# Altium PCB LimeSDR-Micro_mPCIe_1v4.PcbDoc (part 1 of 11)
Units mm, origin at the board's own origin, x right, y up, seen from the top; angles counter-clockwise.
Board outline 50.8 x 29.7 mm, 8 copper layers (Top, L2, L3, L4, L5, L6, L7, Bottom), stack 0.925 mm thick; 664 components, 386 nets, 2358 pads, 843 vias.
Unrouted connection lines stored in the file: 28.
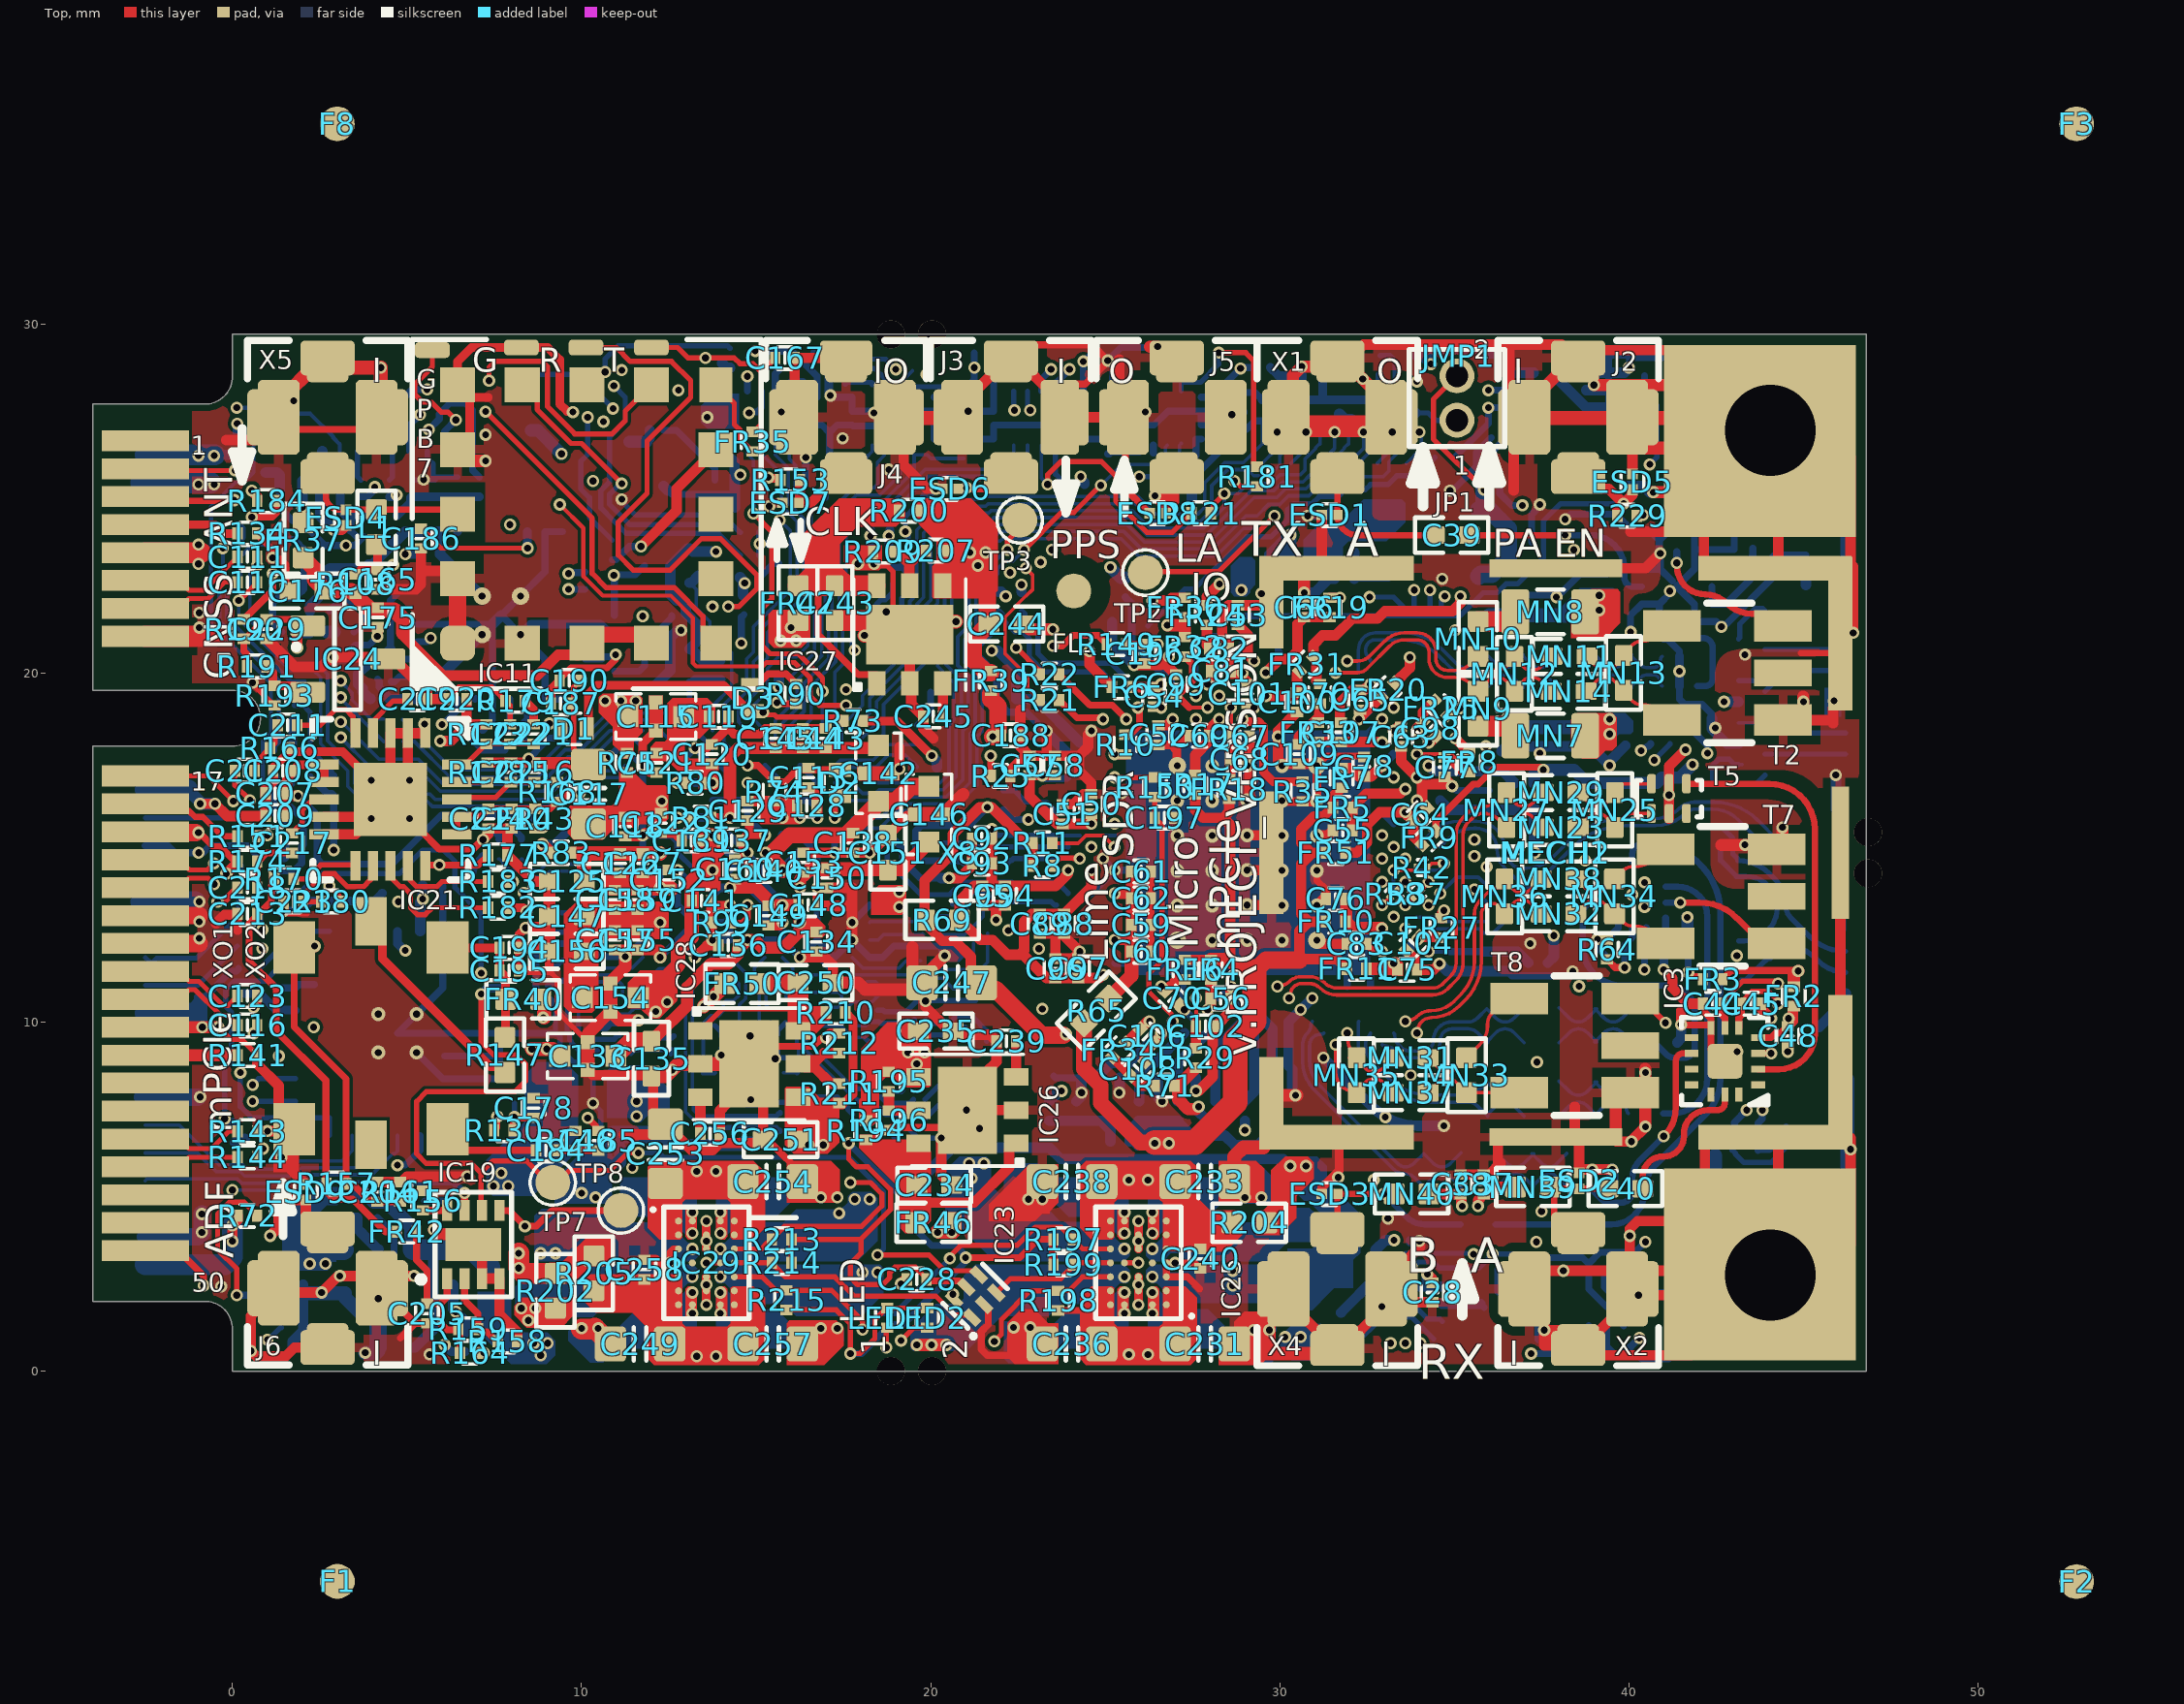
[diagram p0: Top view]
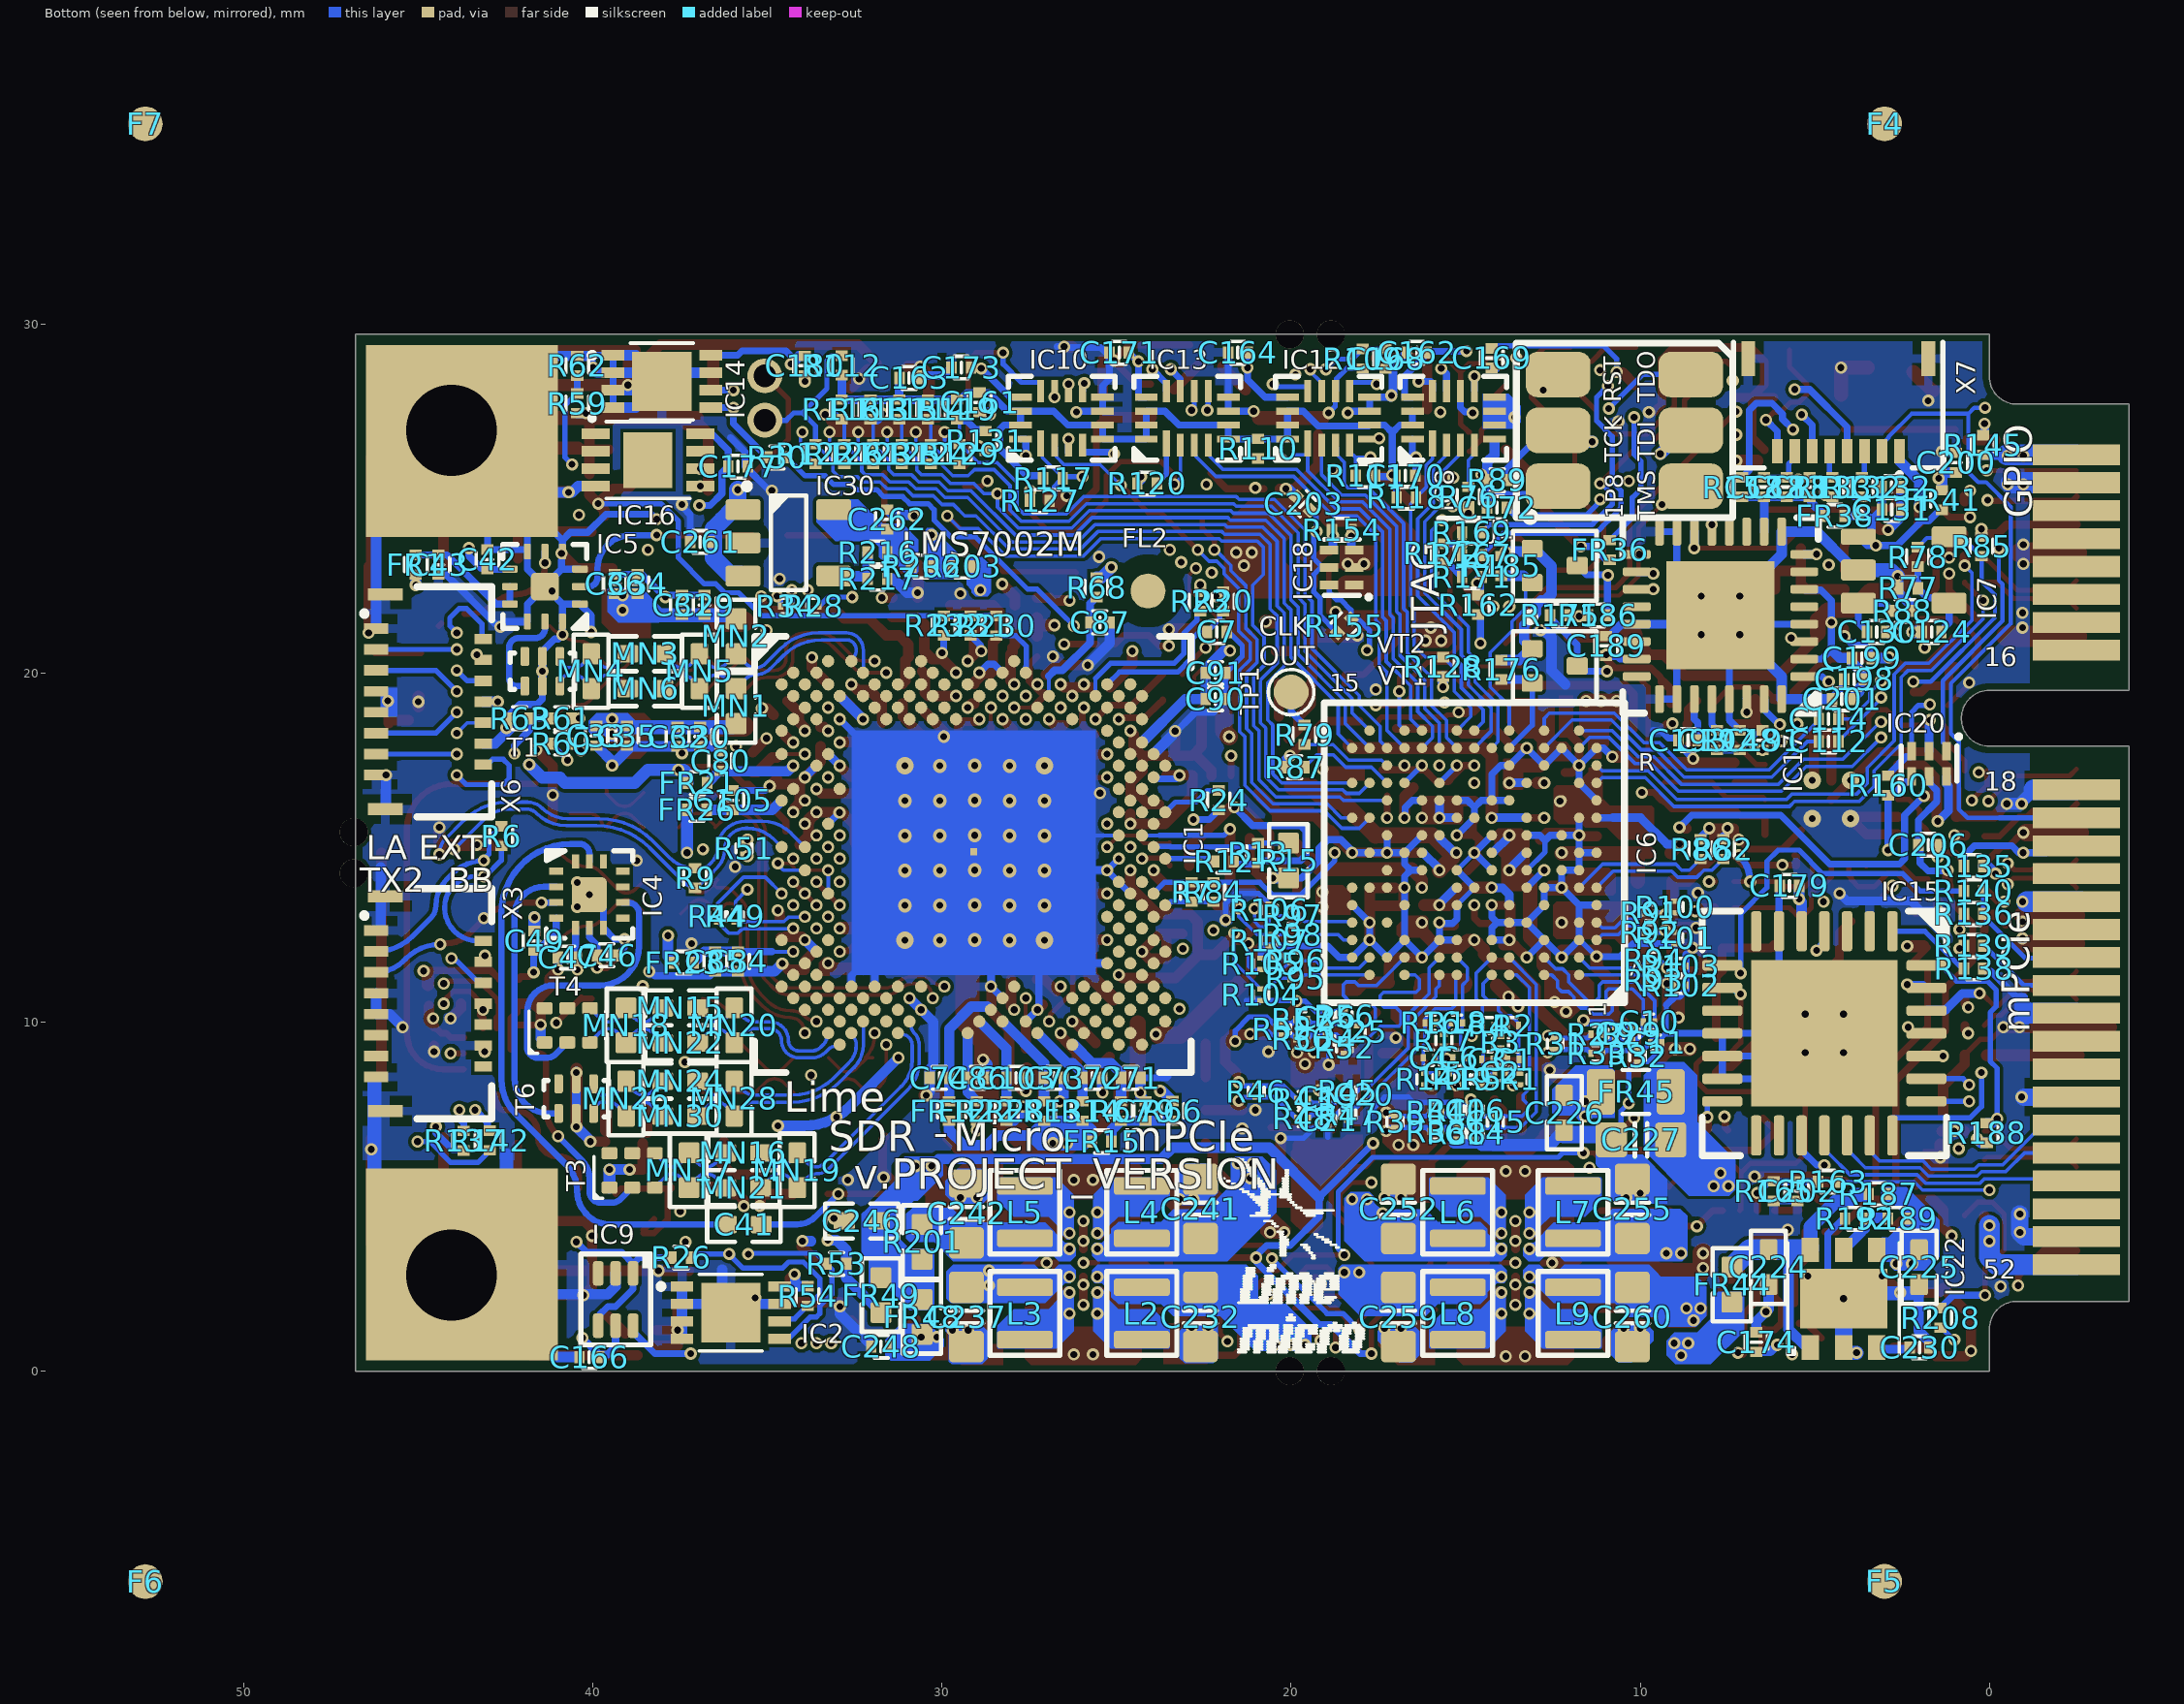
[diagram p1: Bottom view, seen from below]
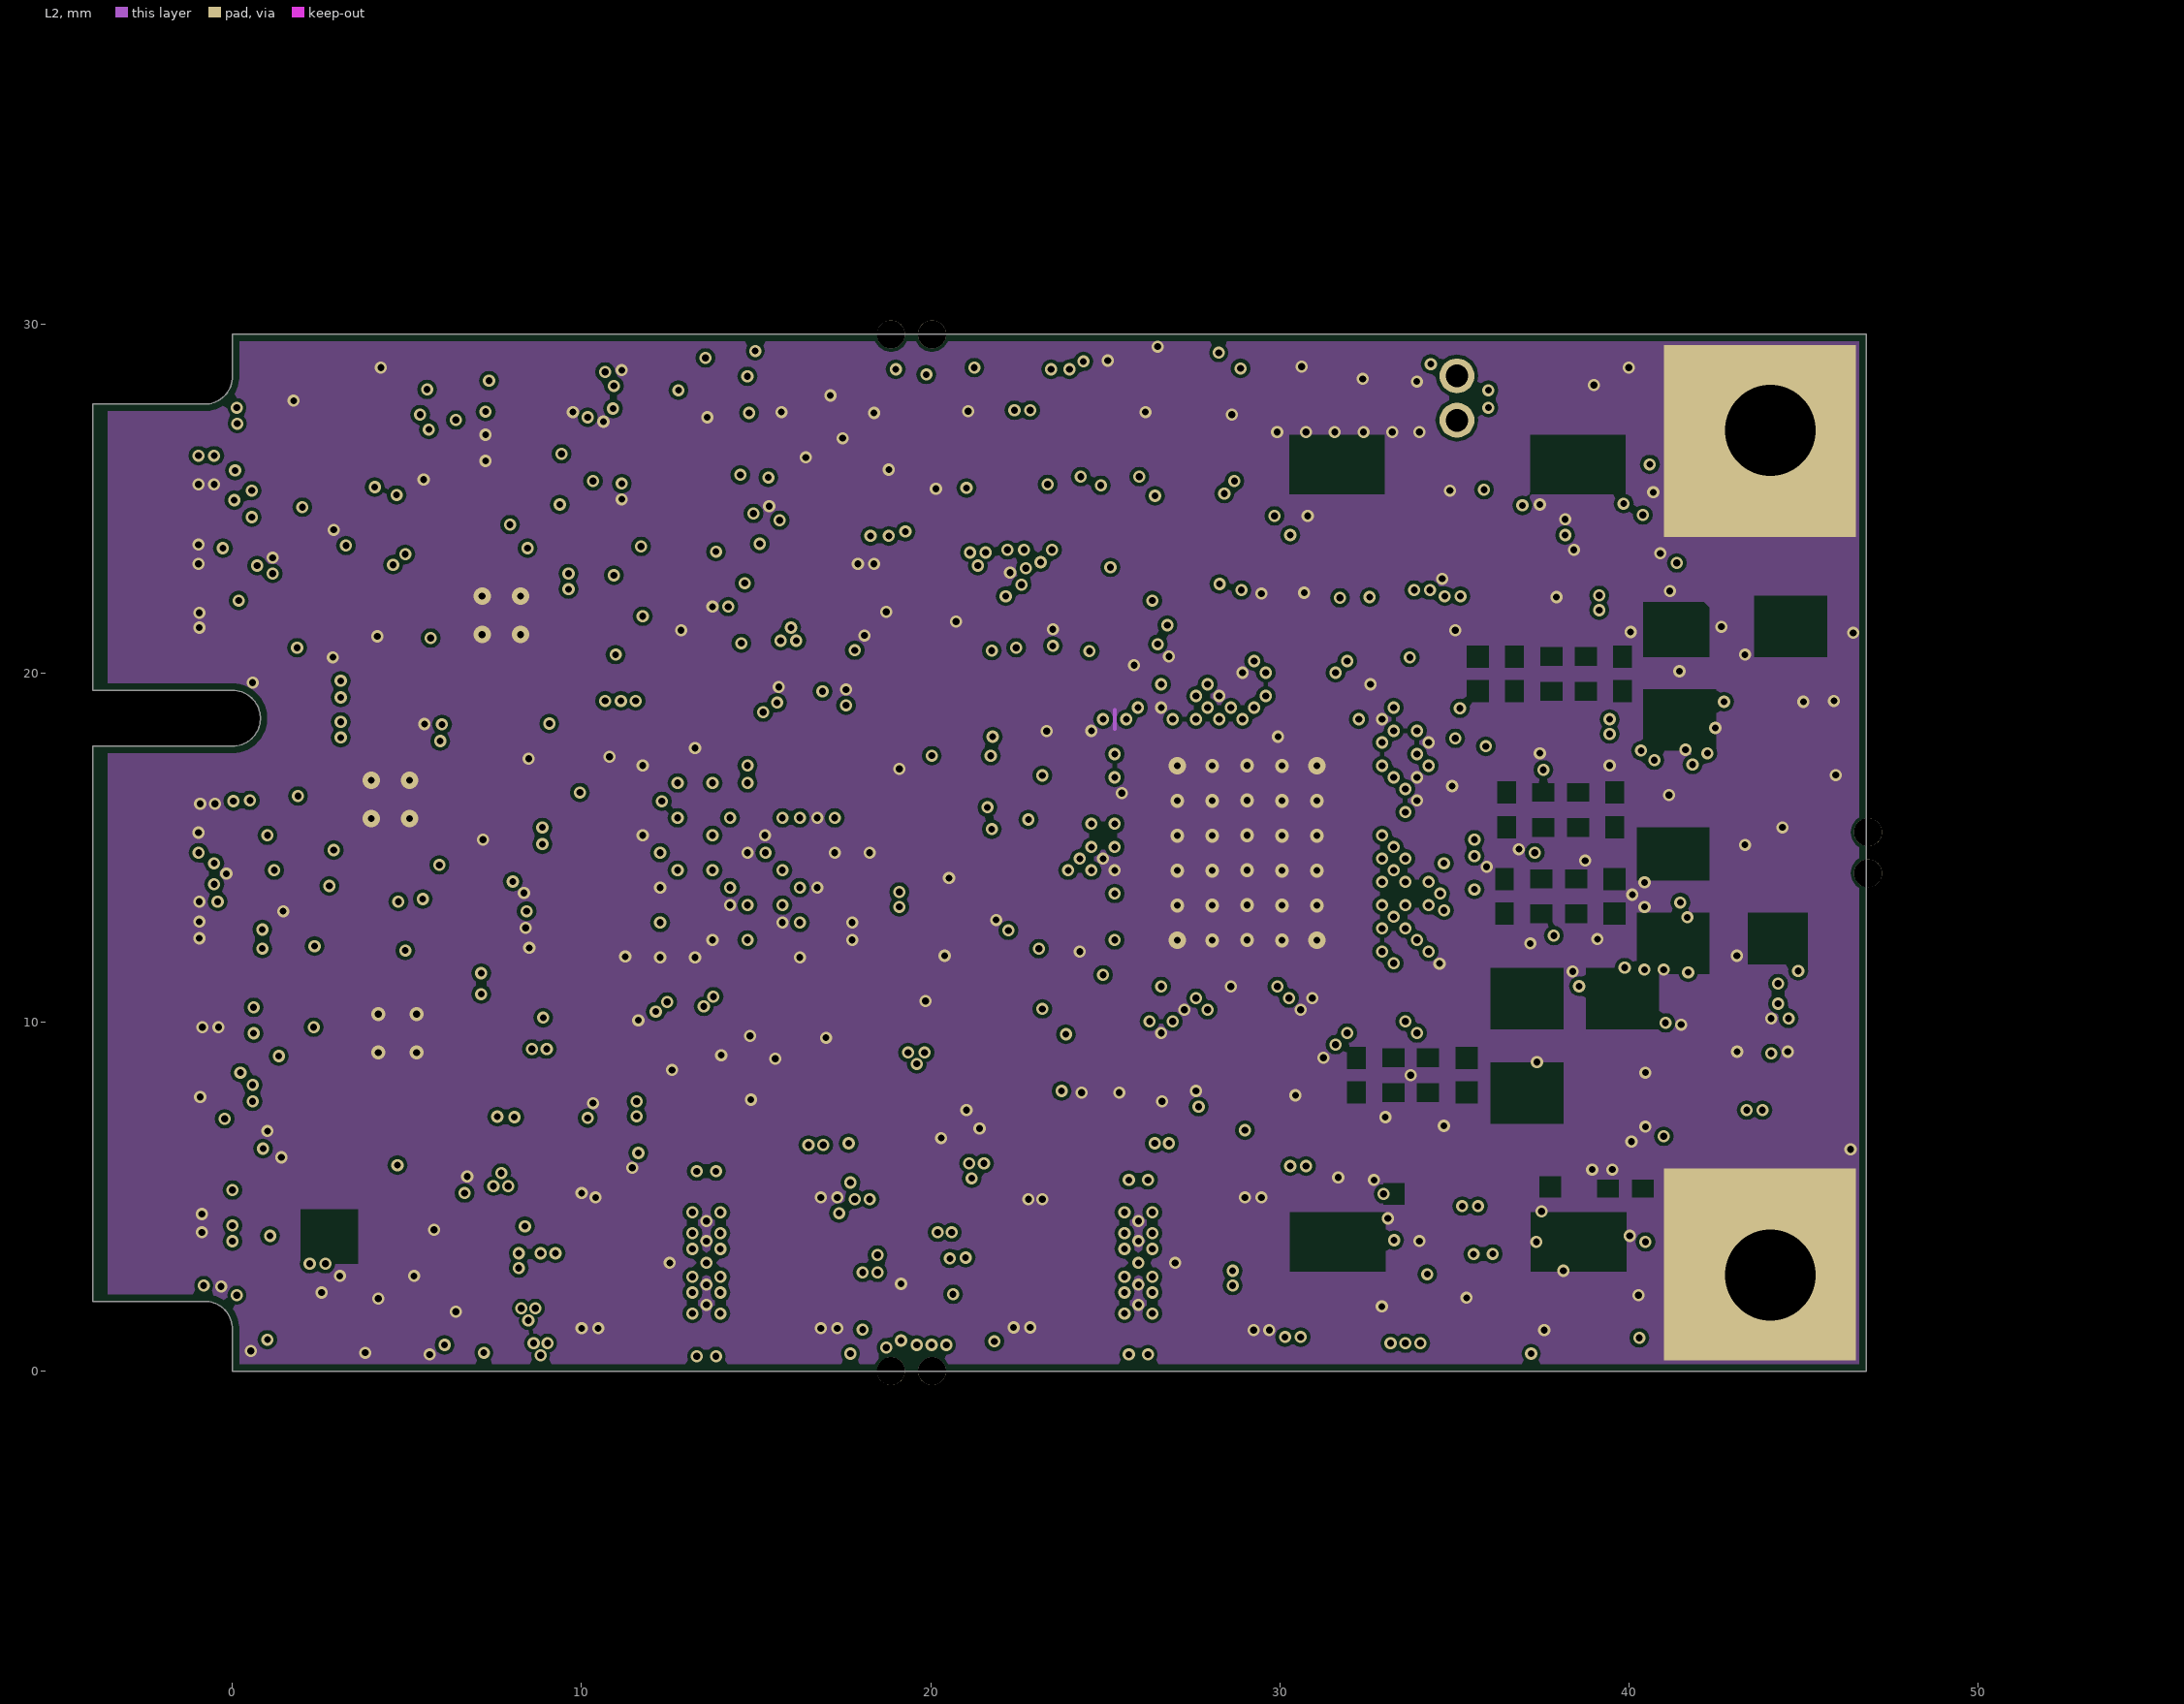
[diagram p2: L2]
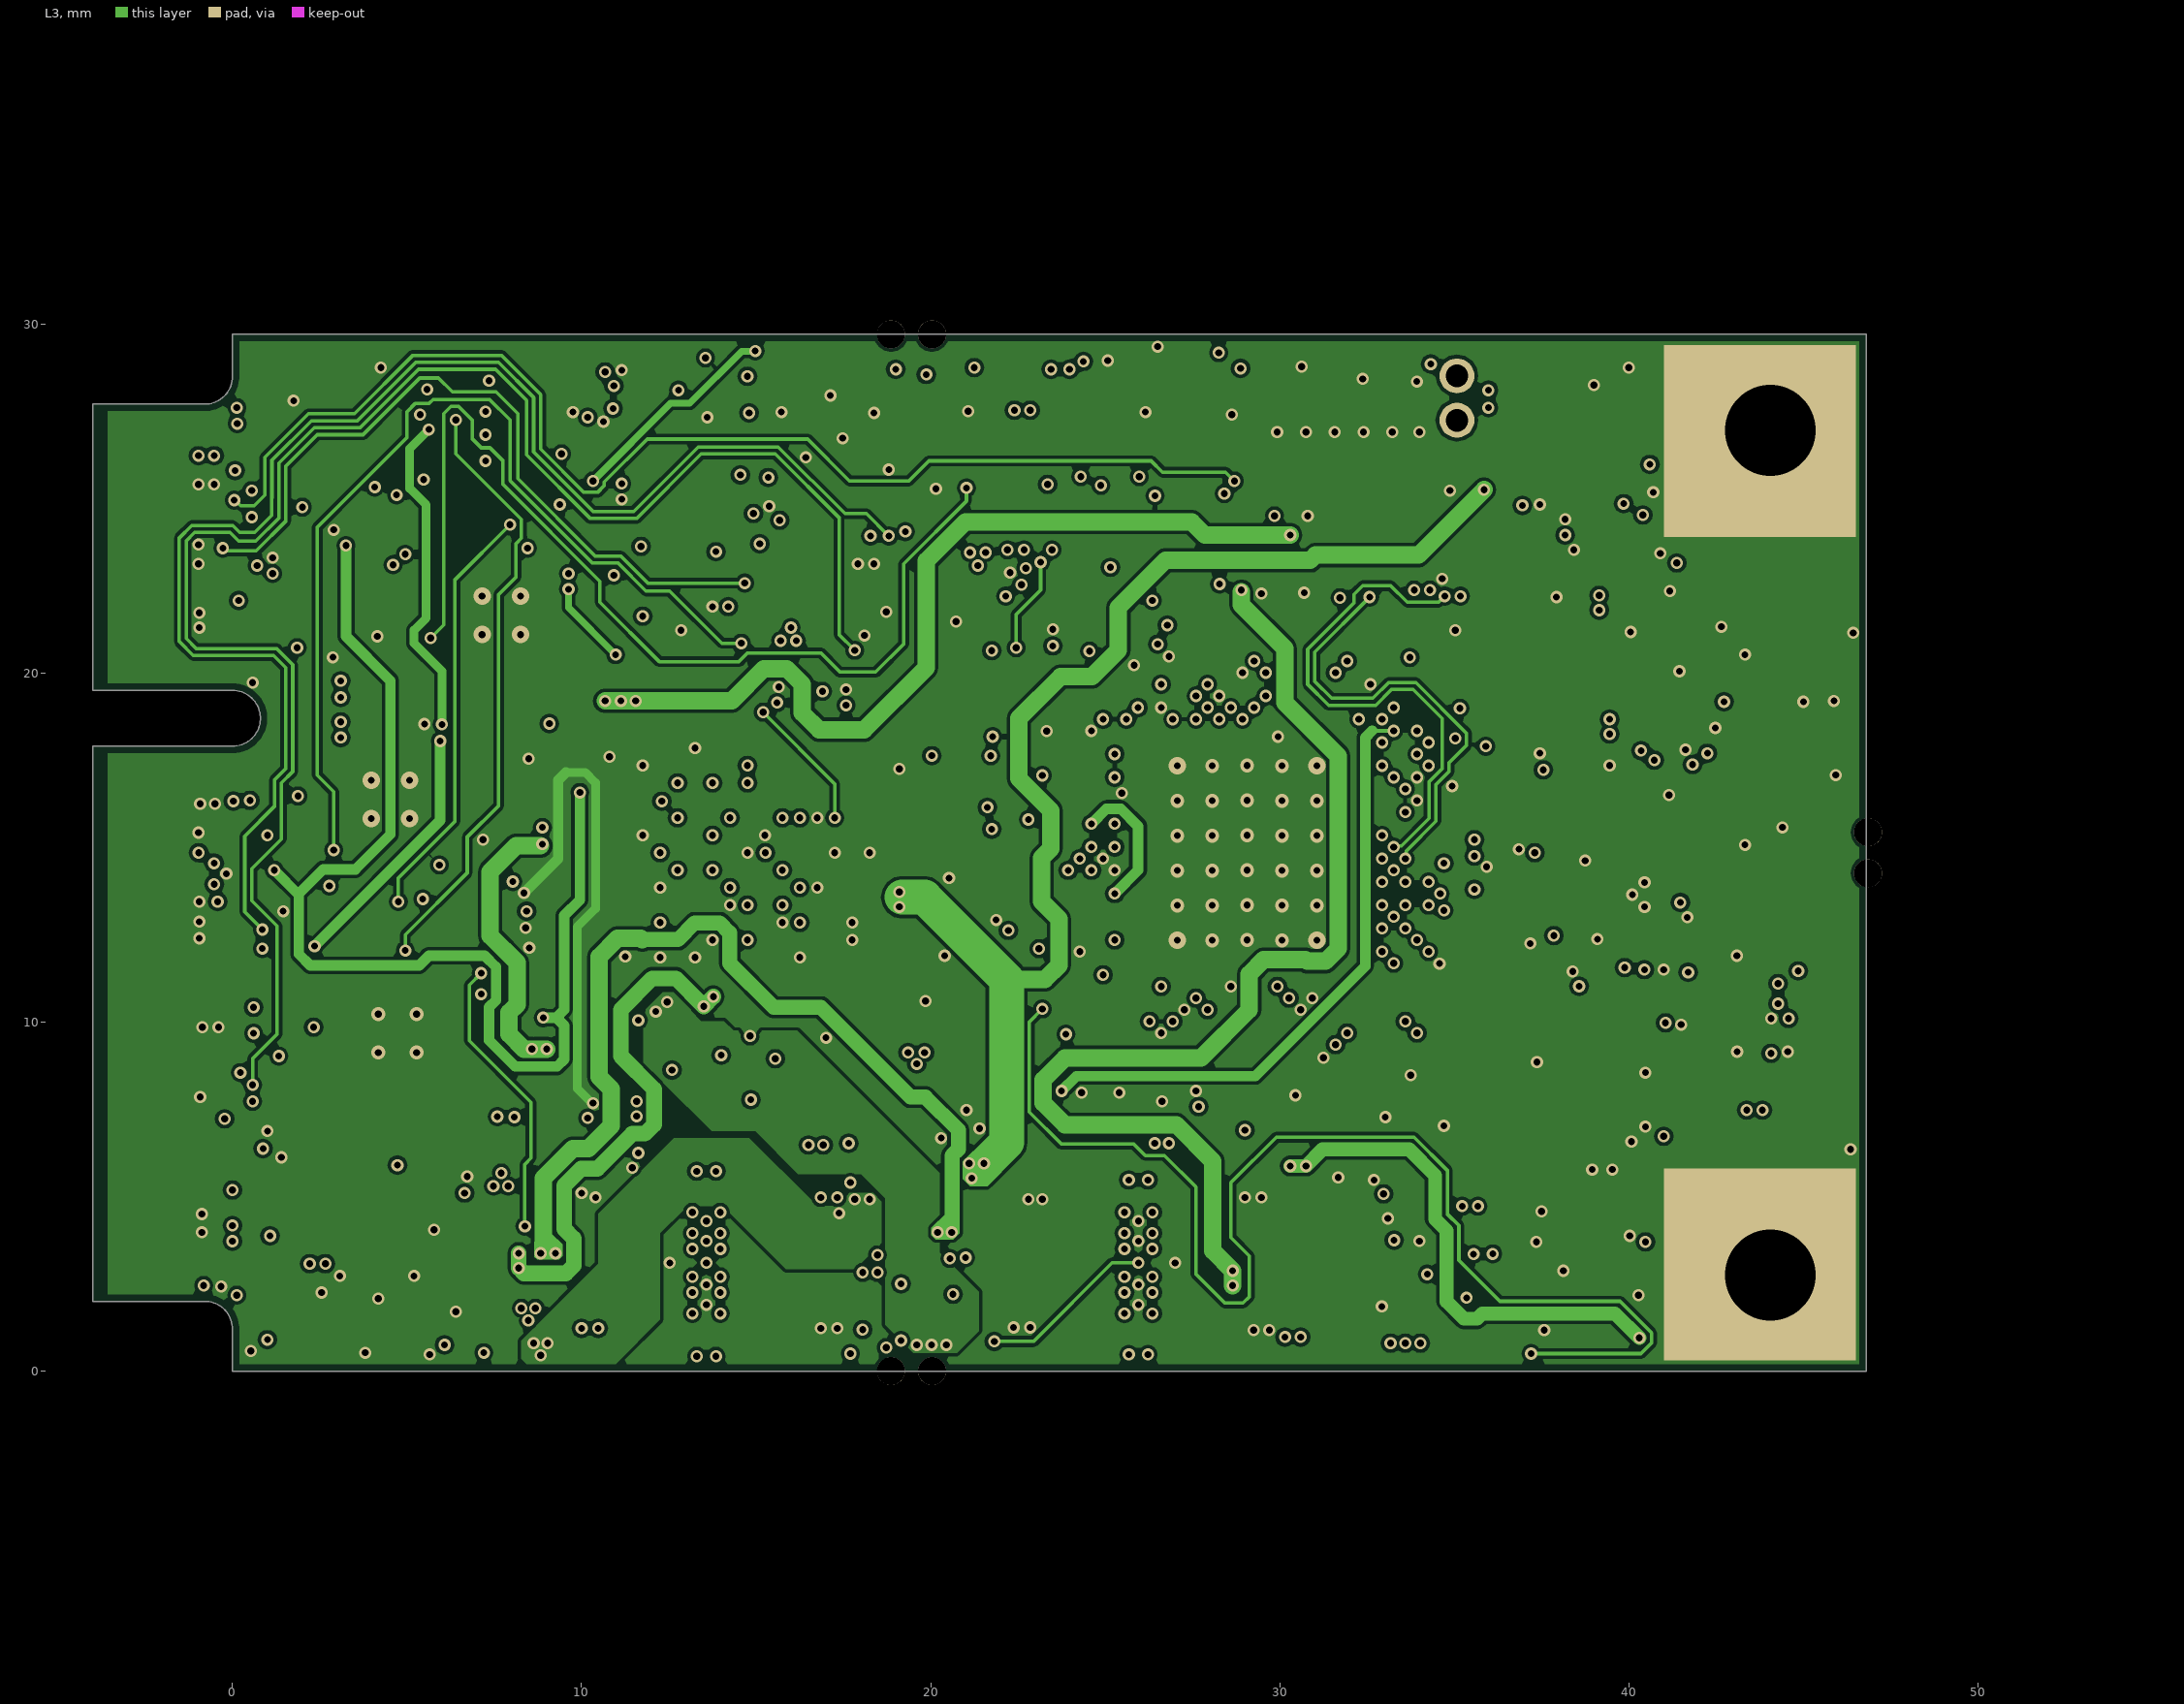
[diagram p3: L3]
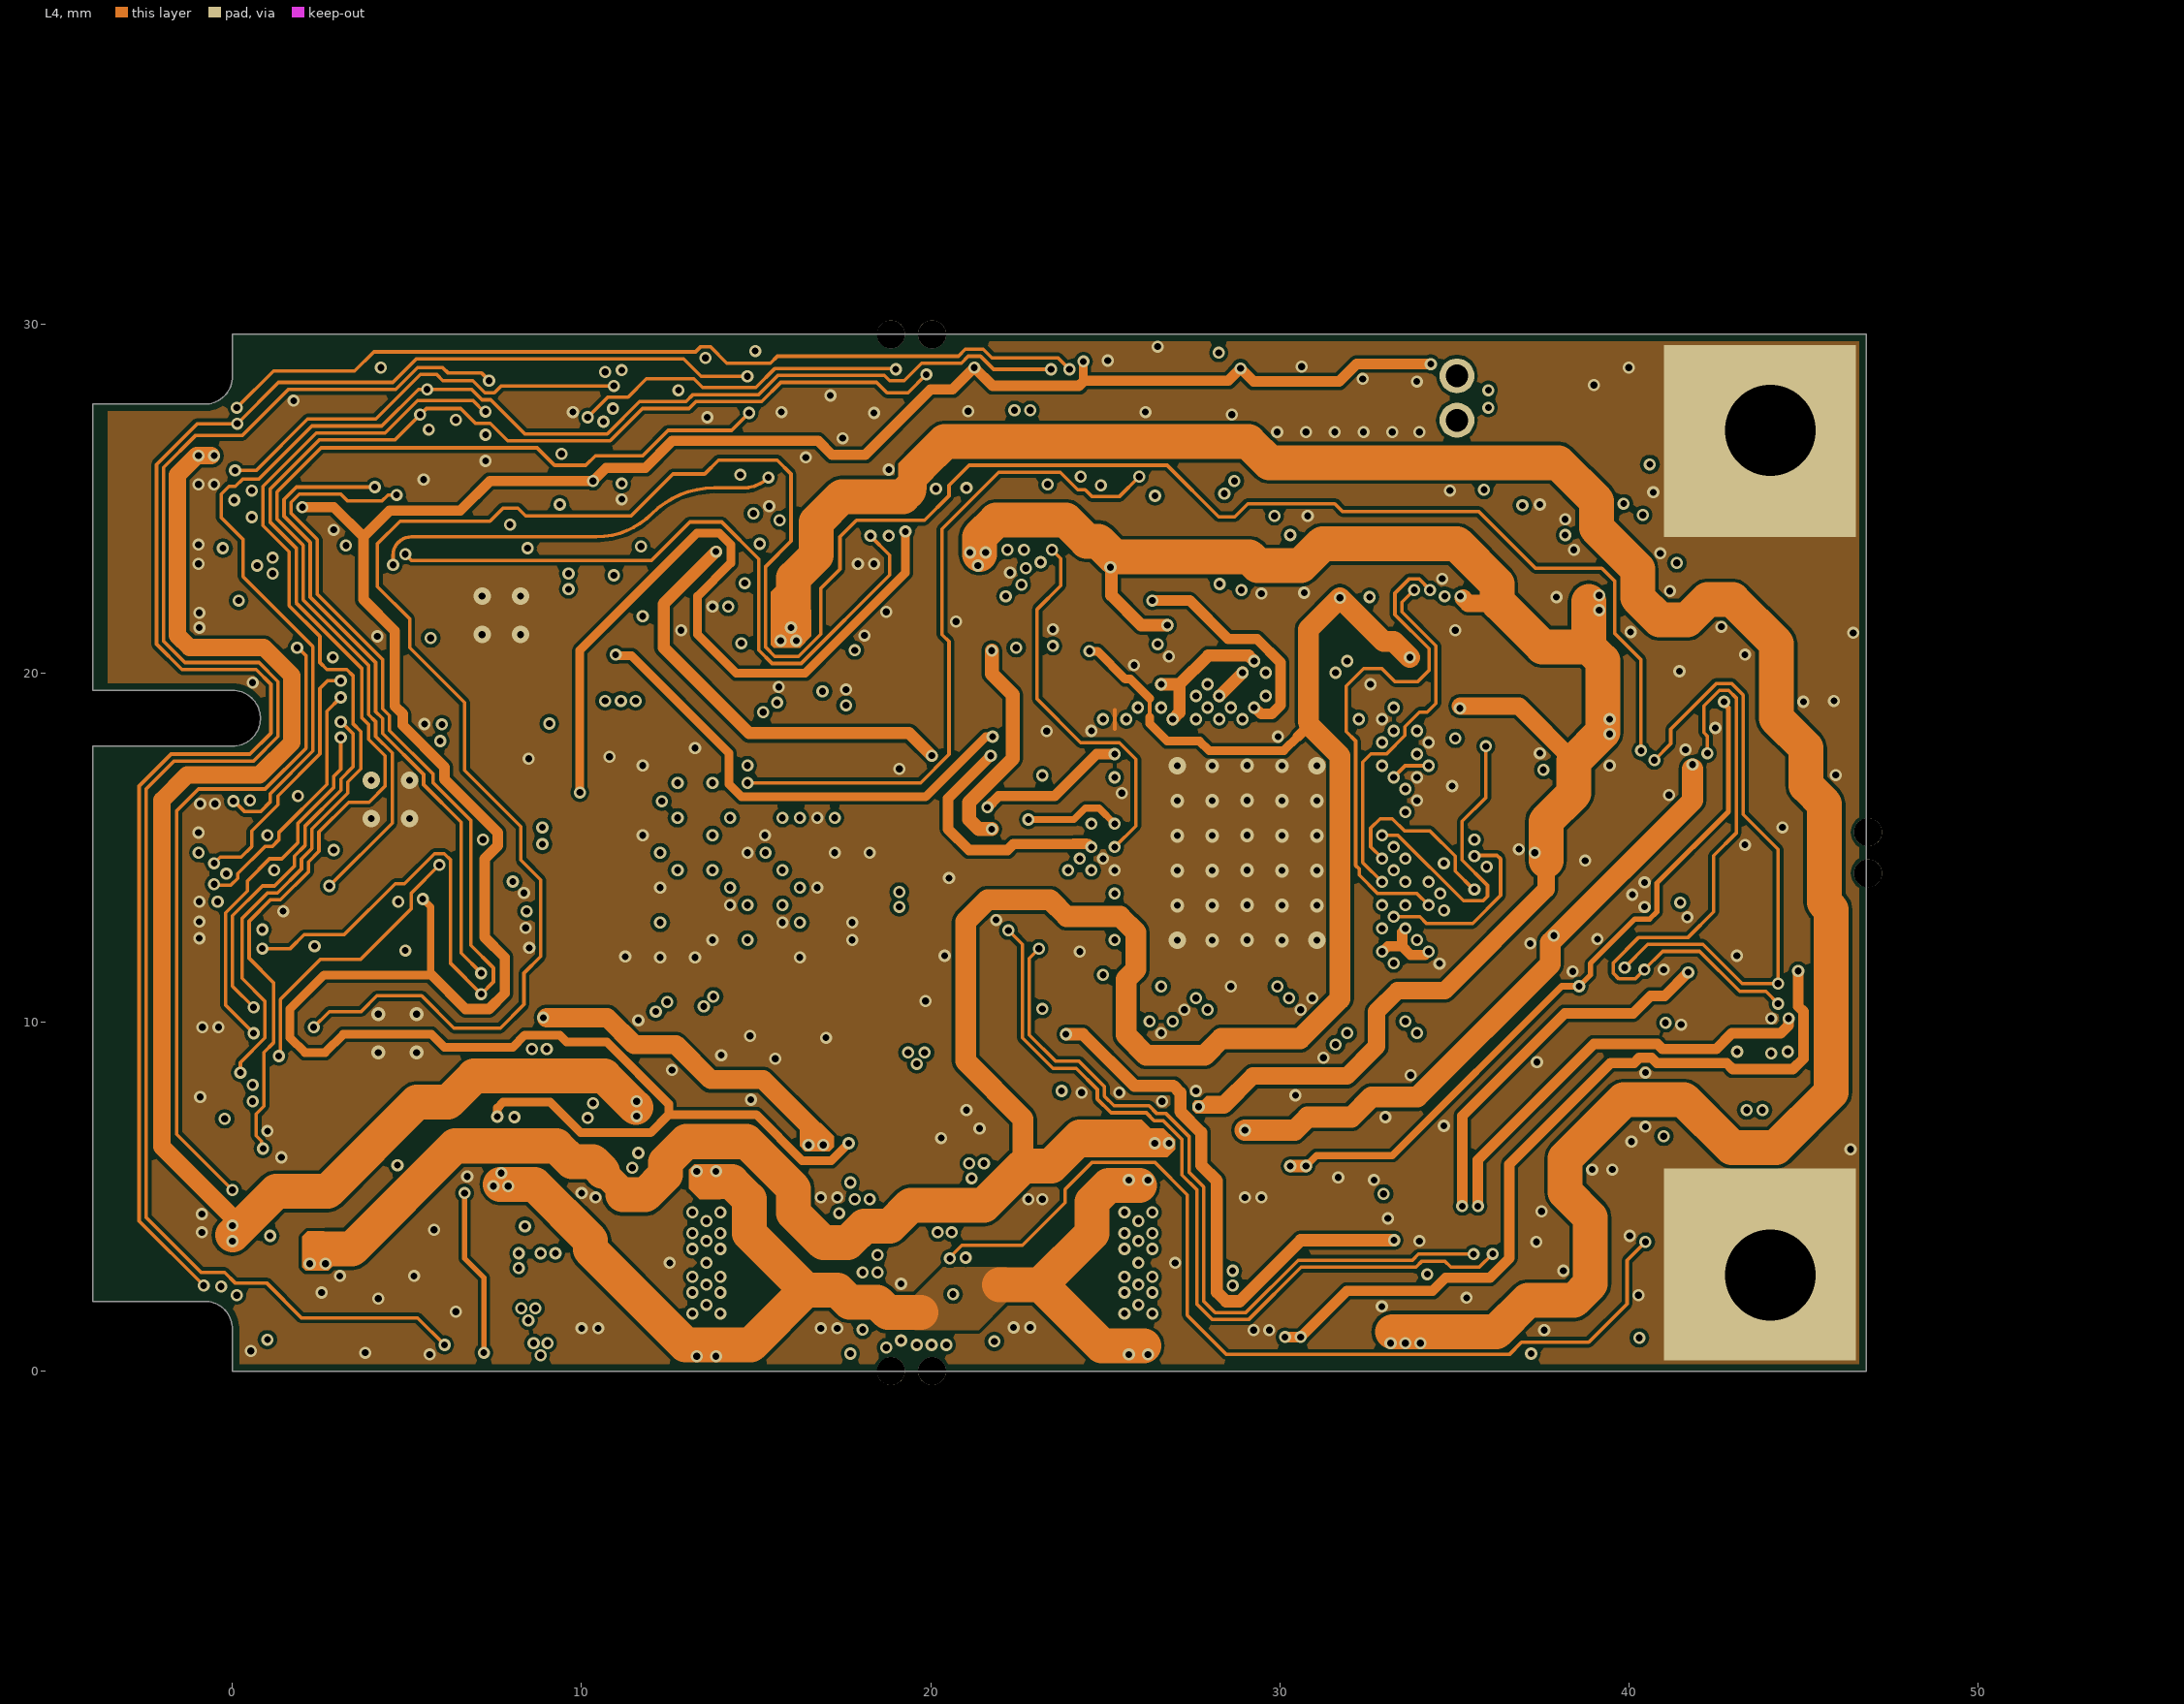
[diagram p4: L4]
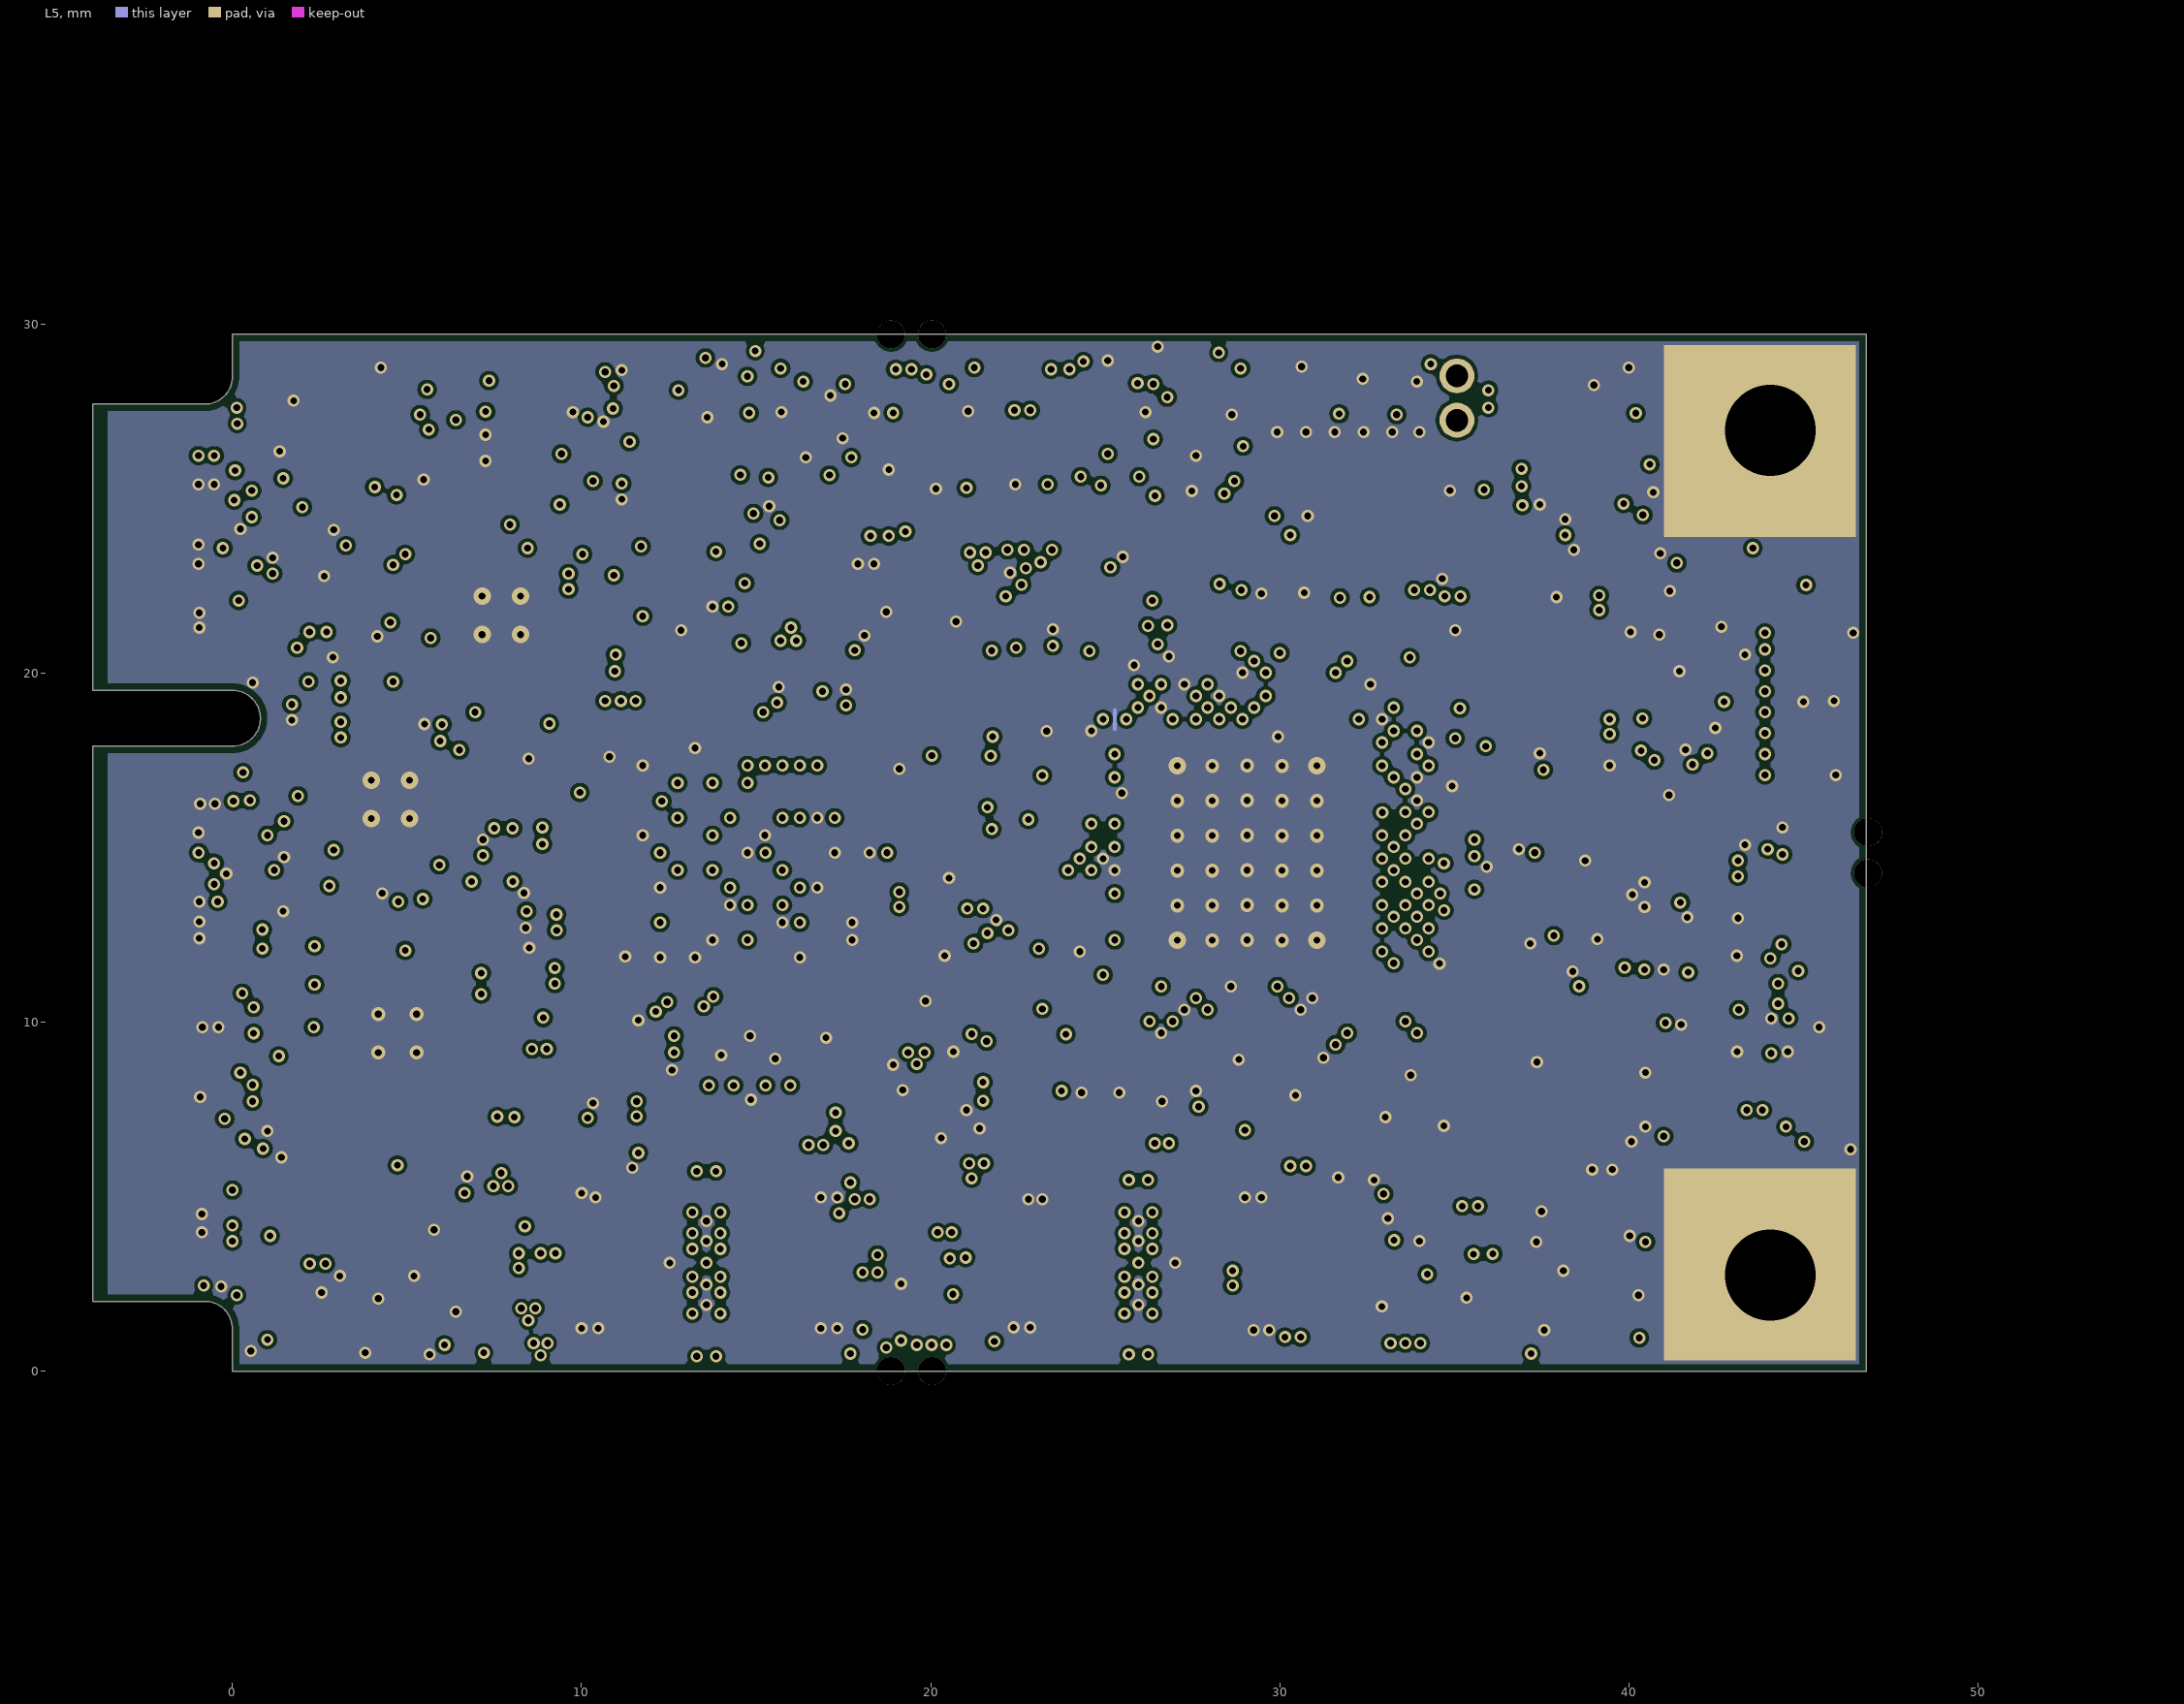
[diagram p5: L5]
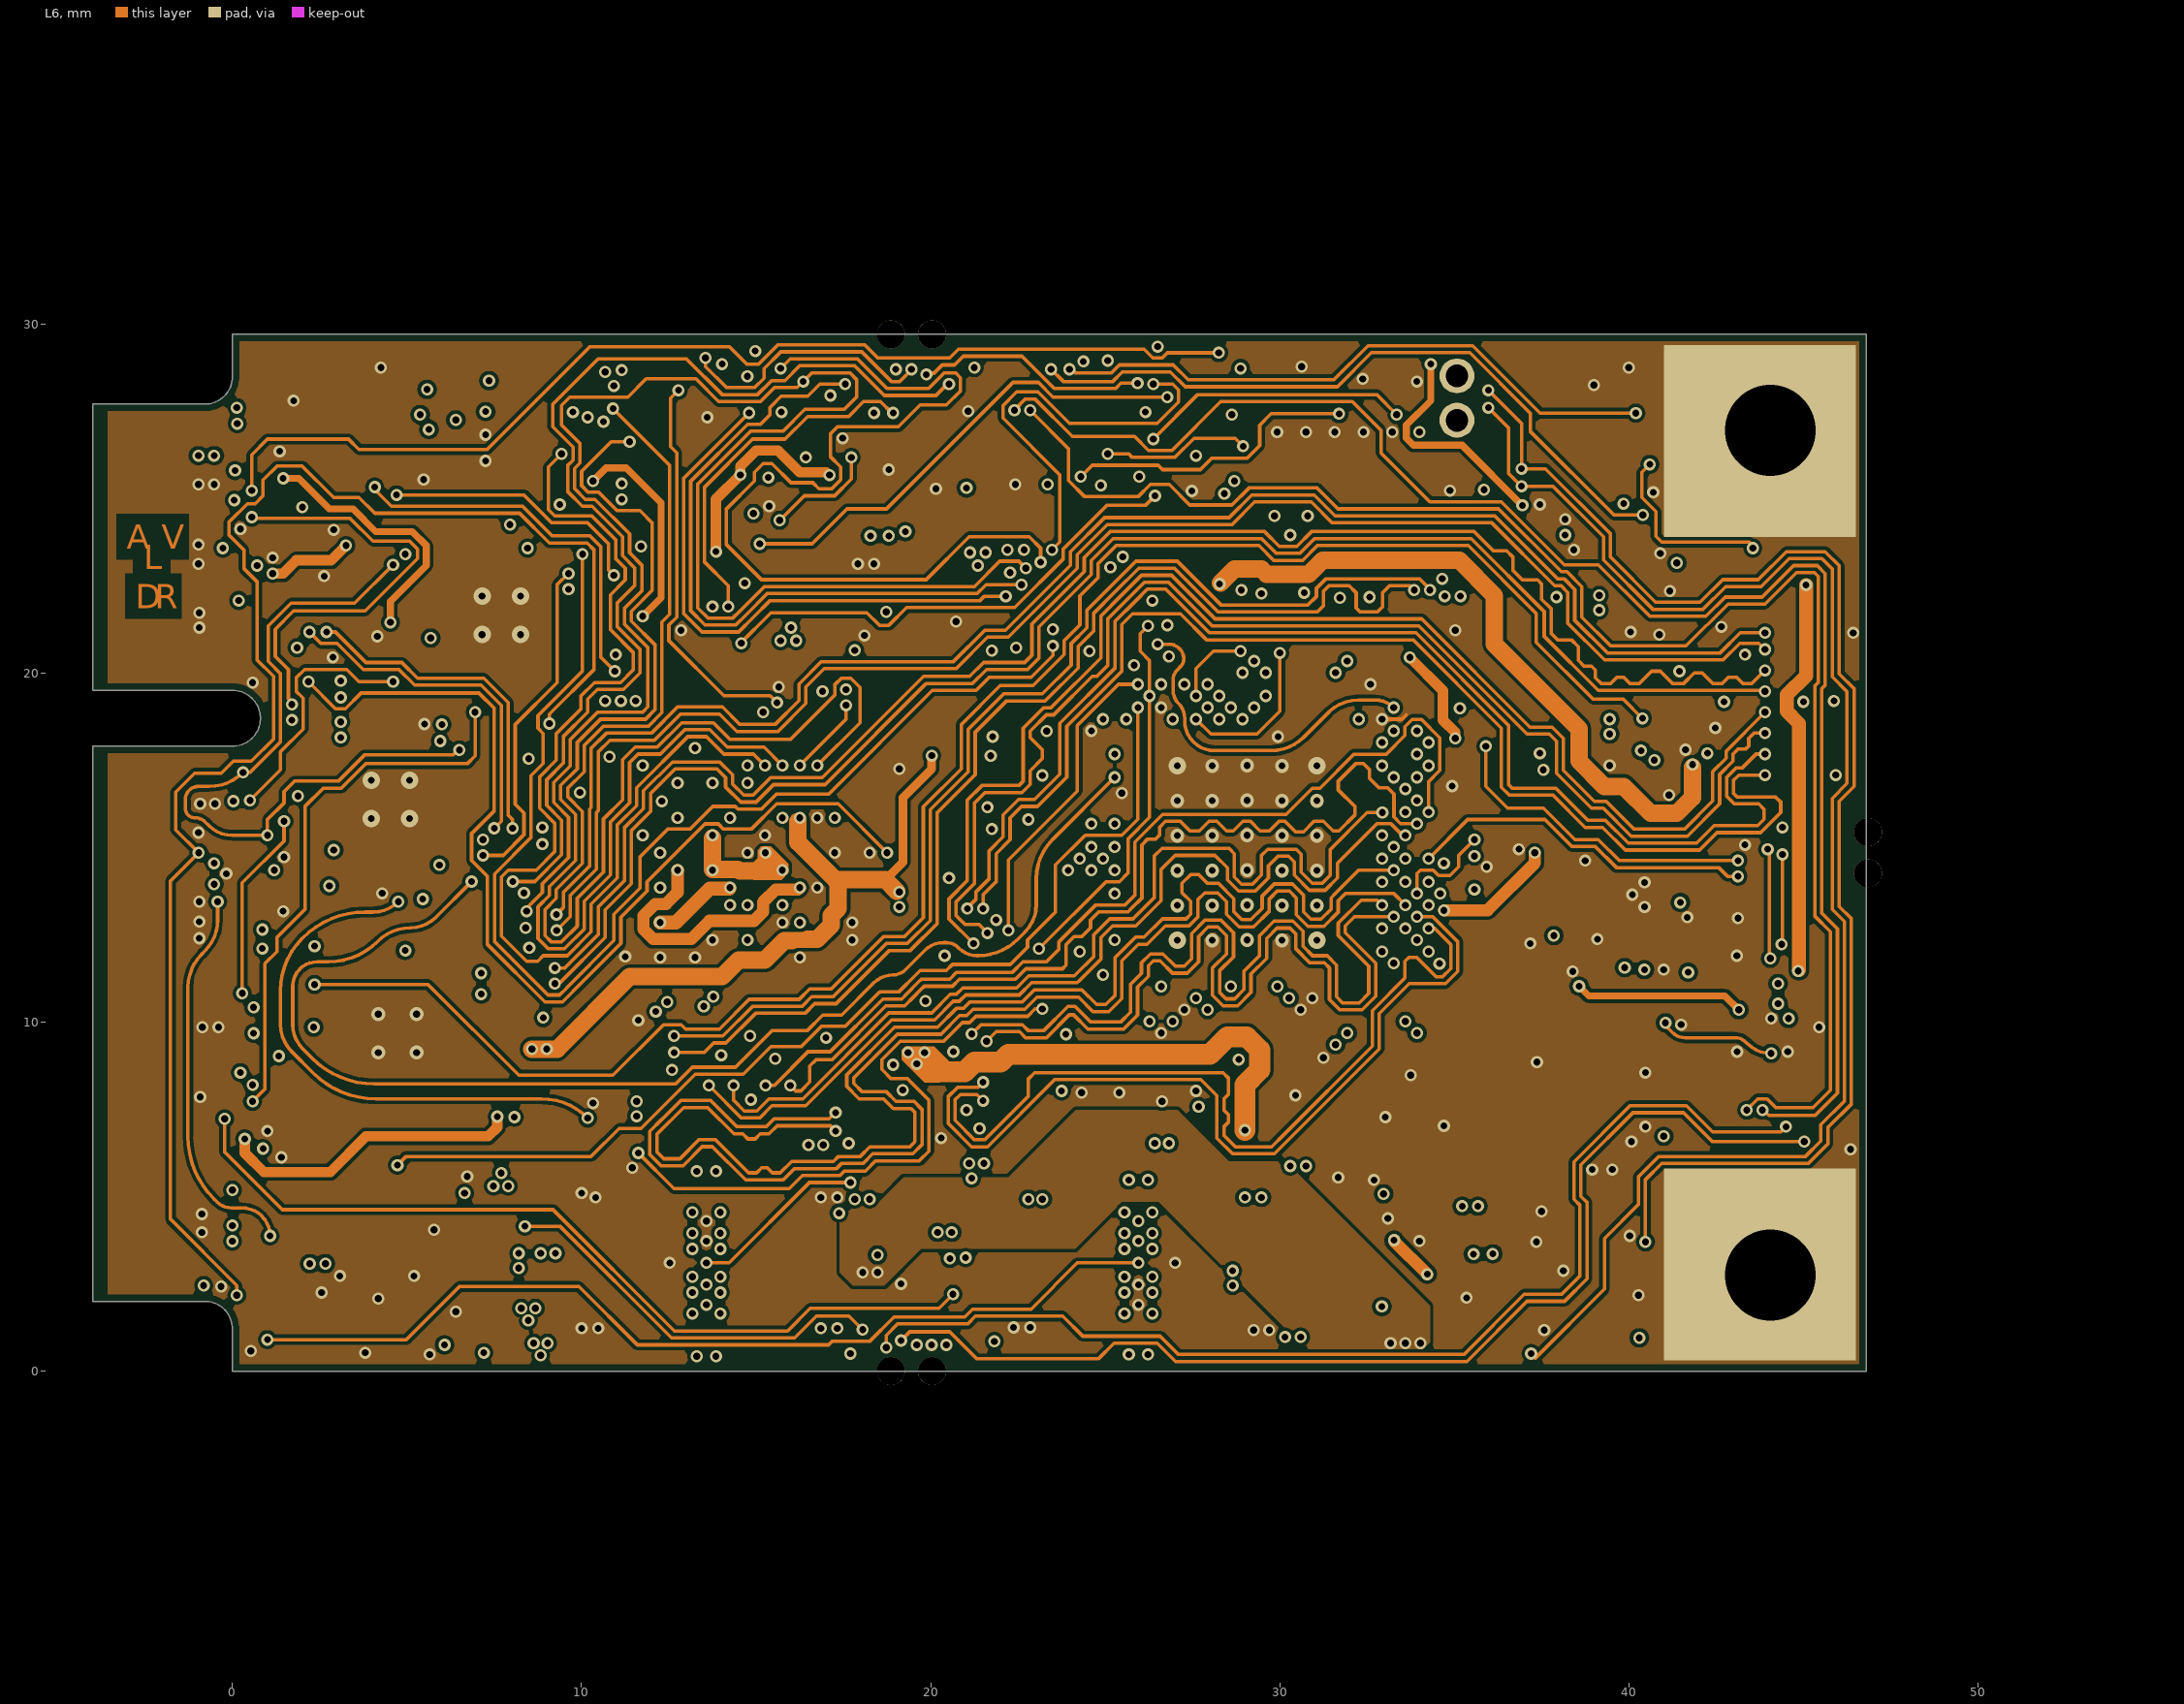
[diagram p6: L6]
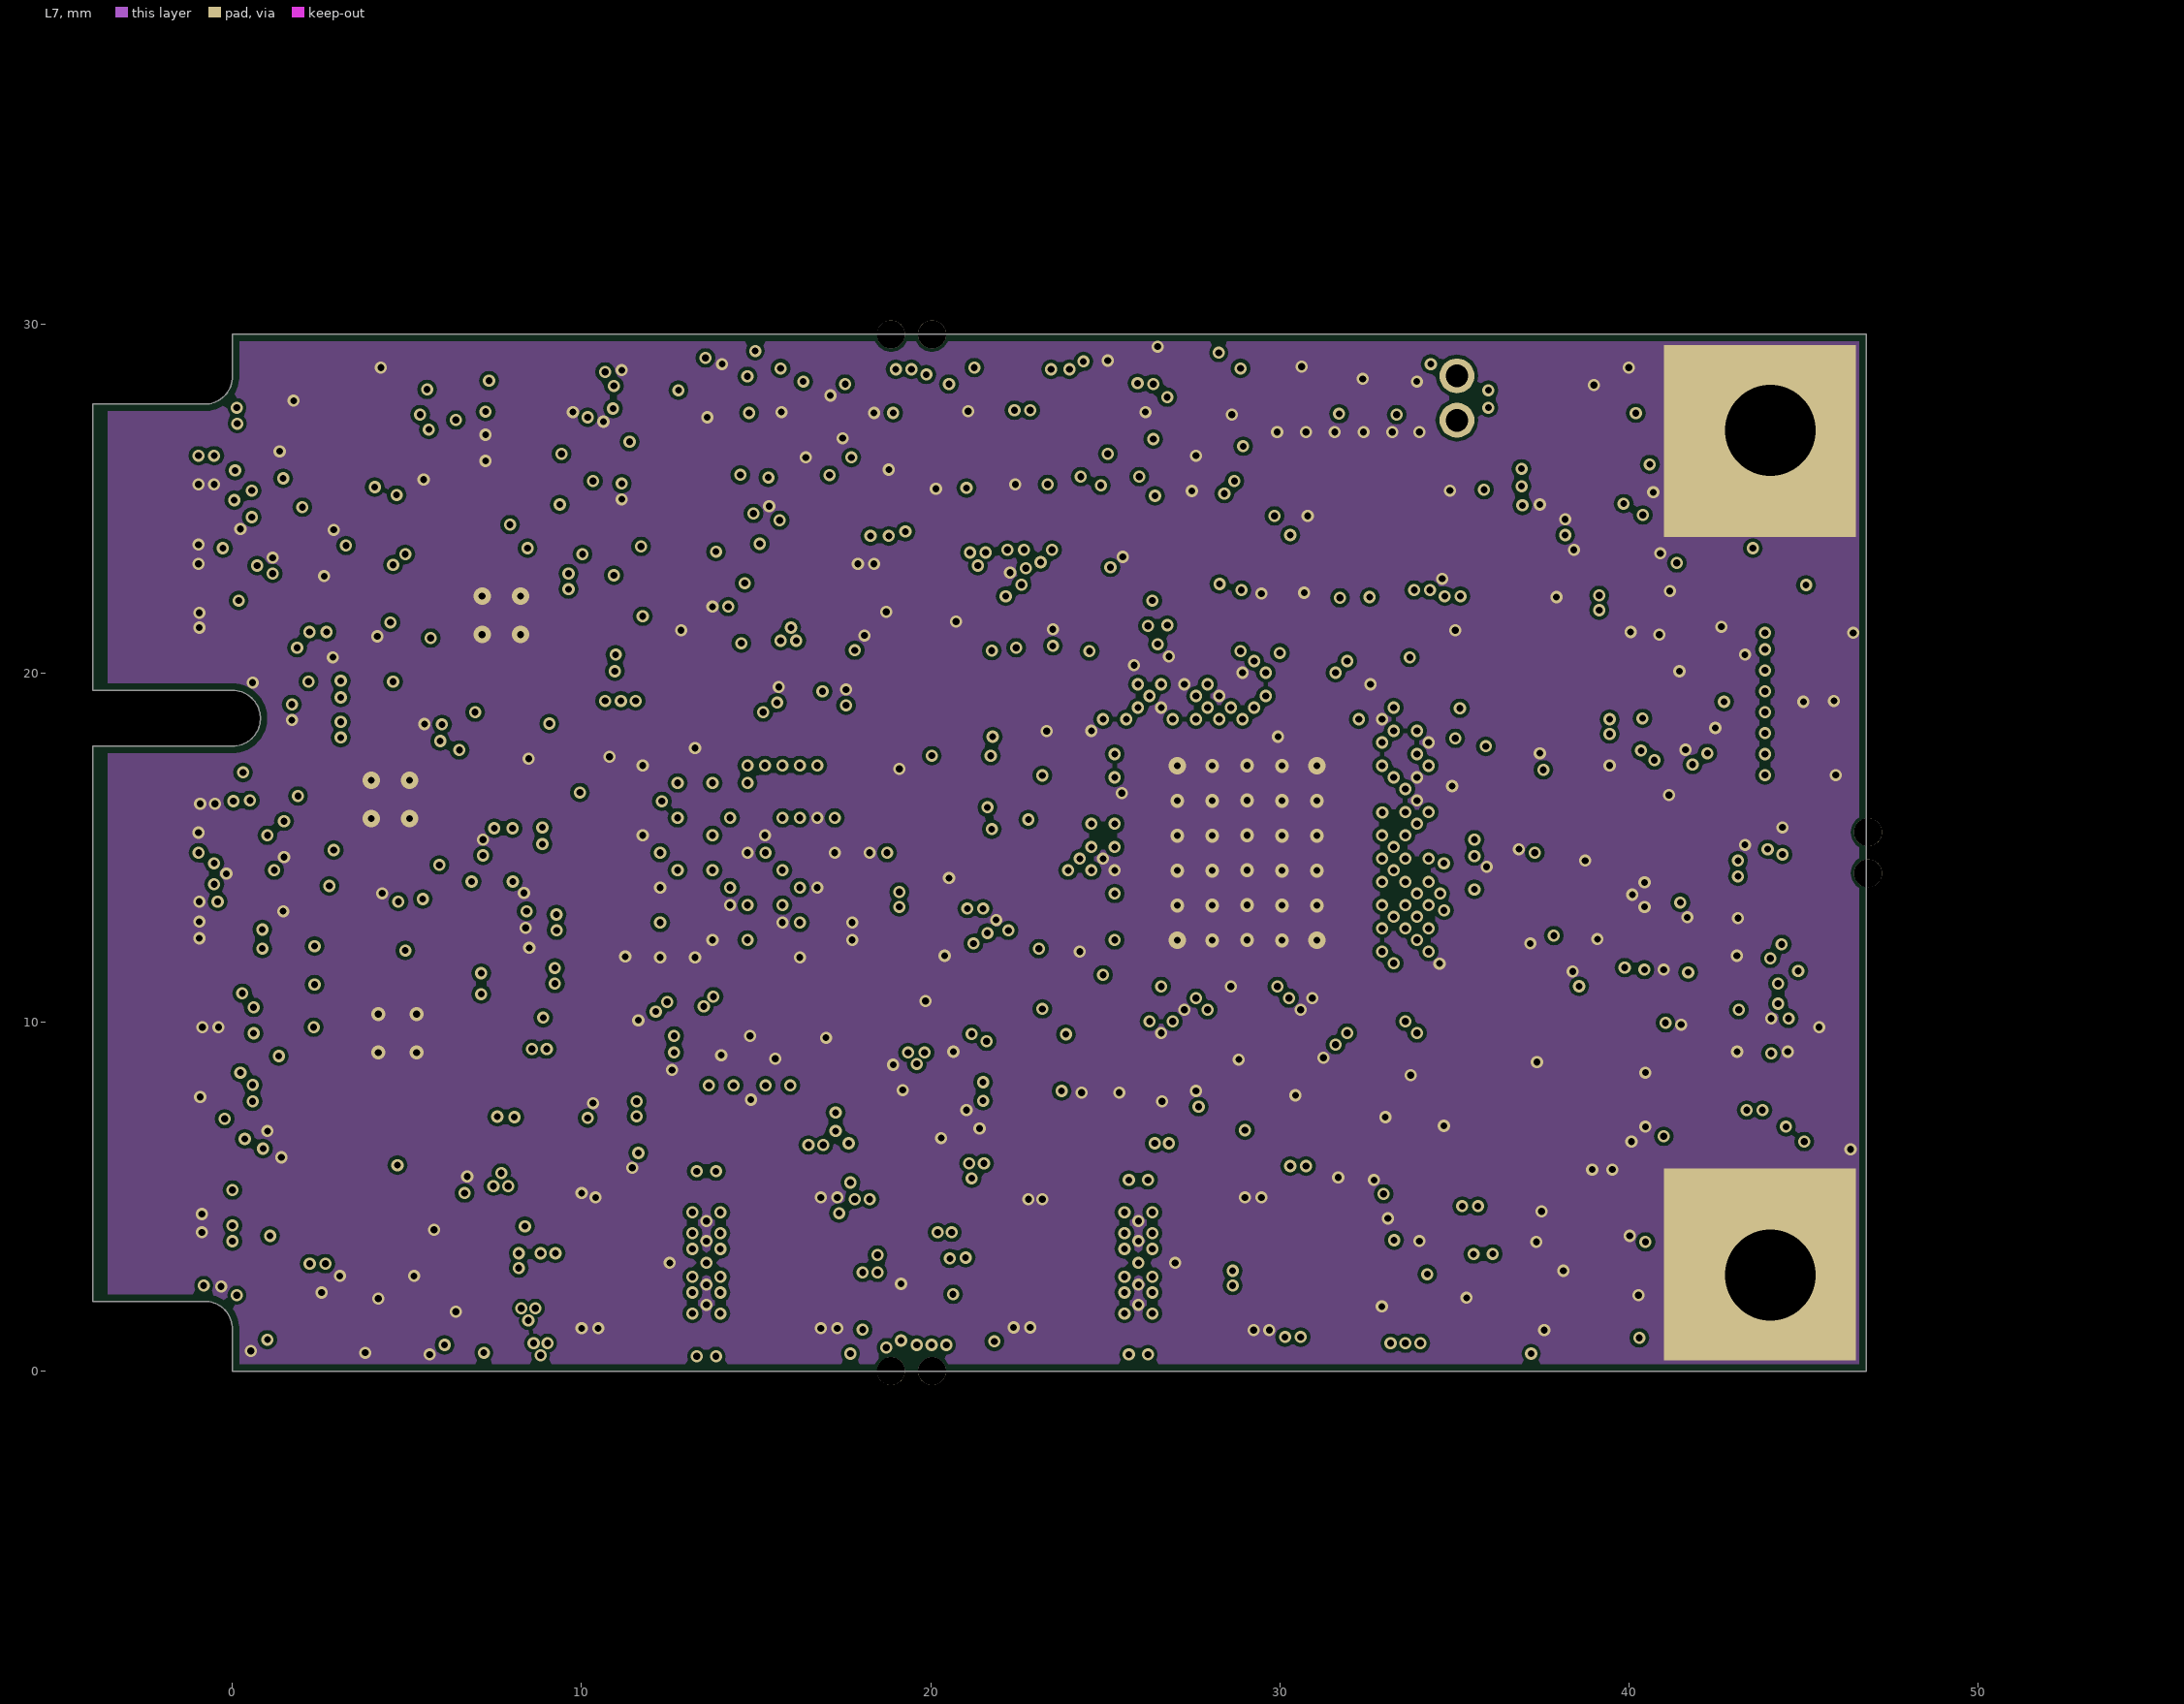
[diagram p7: L7]

## Layer stack, top to bottom
TopSolder: solder mask 0.0102, Solder Resist, Dk 3.5
Top: signal copper 0.0178
Dielectric1: core 0.1, FR-4, Dk 4.8
L2: signal copper 0.0356
Dielectric2: prepreg 0.1, FR-4, Dk 4.2
L3: signal copper 0.03
Dielectric3: core 0.1, FR-4, Dk 4.2
L4: signal copper 0.034
Dielectric 4: prepreg 0.1, Dk 4.2
L5: signal copper 0.03
Dielectric 10: core 0.1, Dk 4.2
L6: signal copper 0.03
Dielectric 11: prepreg 0.1, Dk 4.2
L7: signal copper 0.03
Dielectric 8: core 0.1, Dk 4.2
Bottom: signal copper 0.0178
BottomSolder: solder mask 0.0102, Solder Resist, Dk 3.5

## Board outline
-4,2 -4,17.9 0,17.9 ccw(c0,18.7) 0,19.5 -4,19.5 -4,27.7 -0.8,27.7 ccw(c-0.8,28.5) 0,28.5 0,29.7 46.8,29.7 46.8,0 0,0 0,1.2 ccw(c-0.8,1.2) -0.8,2

## Design rules (kind name [scope] priority, off if disabled: settings)
BoardOutlineClearance [All] p1: gap=0.2 ignorepadtopadclearanceinfootprint=FALSE
Clearance [All] p1: gap=0.1 ignorepadtopadclearanceinfootprint=FALSE
ComponentClearance ComponentClearance_MiniPCIE [HasFootprint('PCIe_MiniCard')] p1: gap=-1 collisioncheckmode=3 verticalgap=2540 showdistances=FALSE
ComponentClearance ComponentClearance_CLK_RES [InComponent('IC7') vs InComponent('R77') or InComponent('R78') or InComponent('R88')] p2: gap=-1 collisioncheckmode=3 verticalgap=2540 showdistances=FALSE
ComponentClearance ComponentClearance_RF_SHIELD [InComponent('MECH*') or InComponent('J3')] p3: gap=-10 collisioncheckmode=3 verticalgap=2540 showdistances=FALSE
ComponentClearance ComponentClearance_rakon [HasFootprint('RAKON_RPT7050A') vs HasFootprint('RAKON_TXCO')] p4: gap=-2 collisioncheckmode=3 verticalgap=2540 showdistances=FALSE
ComponentClearance ComponentClearance_BOOT_jumper [HasFootprint('MECH_JUMPER_HALF_PITCH') vs HasFootprint('HEADER_2x1_TH_HALF_PITCH')] p5: gap=-2 collisioncheckmode=3 verticalgap=2540 showdistances=FALSE
ComponentClearance [All] p6: gap=0.01 collisioncheckmode=3 verticalgap=0.254 showdistances=FALSE
DiffPairsRouting DiffPairsRouting_USB3 [InNetClass('FX3_DATA')] p1: maxlimit=0.3 minlimit=0.1 mostfreqgap=0.14 toplayer_minwidth=0.2 toplayer_maxwidth=0.2 toplayer_prefwidth=0.2 midlayer1_minwidth=0.2 midlayer1_maxwidth=0.2 midlayer1_prefwidth=0.2 midlayer2_minwidth=0.2 midlayer2_maxwidth=0.2 midlayer2_prefwidth=0.2 midlayer3_minwidth=0.2 midlayer3_maxwidth=0.2 midlayer3_prefwidth=0.2 midlayer4_minwidth=0.2 midlayer4_maxwidth=0.2 midlayer4_prefwidth=0.2 midlayer7_minwidth=0.2 midlayer7_maxwidth=0.2 midlayer7_prefwidth=0.2 midlayer9_minwidth=0.2 midlayer9_maxwidth=0.2 midlayer9_prefwidth=0.2 bottomlayer_minwidth=0.2 bottomlayer_maxwidth=0.2 bottomlayer_prefwidth=0.2 maxuncoupledlength=12.7
DiffPairsRouting DiffPairsRouting_USB3_XTAL [InNet('FX3_XTAL_N') or InNet('FX3_XTAL_P')] p2: maxlimit=0.2 minlimit=0.1 mostfreqgap=0.1 toplayer_minwidth=0.1 toplayer_maxwidth=0.4 toplayer_prefwidth=0.1 midlayer1_minwidth=0.1 midlayer1_maxwidth=0.4 midlayer1_prefwidth=0.1 midlayer2_minwidth=0.1 midlayer2_maxwidth=0.4 midlayer2_prefwidth=0.1 midlayer3_minwidth=0.1 midlayer3_maxwidth=0.4 midlayer3_prefwidth=0.1 midlayer4_minwidth=0.1 midlayer4_maxwidth=0.4 midlayer4_prefwidth=0.1 midlayer7_minwidth=0.1 midlayer7_maxwidth=0.4 midlayer7_prefwidth=0.1 midlayer9_minwidth=0.1 midlayer9_maxwidth=0.4 midlayer9_prefwidth=0.1 bottomlayer_minwidth=0.1 bottomlayer_maxwidth=0.4 bottomlayer_prefwidth=0.1 maxuncoupledlength=0.2
DiffPairsRouting DiffPairsRouting_TX_RF [InNetClass('TX_RF')] p3: maxlimit=0.14 minlimit=0.1 mostfreqgap=0.1 toplayer_minwidth=0.1 toplayer_maxwidth=0.2 toplayer_prefwidth=0.1 midlayer1_minwidth=0.1 midlayer1_maxwidth=0.2 midlayer1_prefwidth=0.1 midlayer2_minwidth=0.1 midlayer2_maxwidth=0.2 midlayer2_prefwidth=0.1 midlayer3_minwidth=0.1 midlayer3_maxwidth=0.2 midlayer3_prefwidth=0.1 midlayer4_minwidth=0.1 midlayer4_maxwidth=0.2 midlayer4_prefwidth=0.1 midlayer7_minwidth=0.1 midlayer7_maxwidth=0.2 midlayer7_prefwidth=0.1 midlayer9_minwidth=0.1 midlayer9_maxwidth=0.2 midlayer9_prefwidth=0.1 bottomlayer_minwidth=0.1 bottomlayer_maxwidth=0.2 bottomlayer_prefwidth=0.1 maxuncoupledlength=0.2
DiffPairsRouting DiffPairsRouting_RX_RF [InNetClass('RX_RF')] p4: maxlimit=0.3 minlimit=0.1 mostfreqgap=0.1 toplayer_minwidth=0.1 toplayer_maxwidth=0.3 toplayer_prefwidth=0.1 midlayer1_minwidth=0.1 midlayer1_maxwidth=0.3 midlayer1_prefwidth=0.1 midlayer2_minwidth=0.1 midlayer2_maxwidth=0.3 midlayer2_prefwidth=0.1 midlayer3_minwidth=0.1 midlayer3_maxwidth=0.3 midlayer3_prefwidth=0.1 midlayer4_minwidth=0.1 midlayer4_maxwidth=0.3 midlayer4_prefwidth=0.1 midlayer7_minwidth=0.1 midlayer7_maxwidth=0.3 midlayer7_prefwidth=0.1 midlayer9_minwidth=0.1 midlayer9_maxwidth=0.3 midlayer9_prefwidth=0.1 bottomlayer_minwidth=0.1 bottomlayer_maxwidth=0.3 bottomlayer_prefwidth=0.1 maxuncoupledlength=0.2
DiffPairsRouting [All] p5: maxlimit=0.3 minlimit=0.1 mostfreqgap=0.1 toplayer_minwidth=0.1 toplayer_maxwidth=0.5 toplayer_prefwidth=0.2 midlayer1_minwidth=0.1 midlayer1_maxwidth=0.5 midlayer1_prefwidth=0.2 midlayer2_minwidth=0.1 midlayer2_maxwidth=0.5 midlayer2_prefwidth=0.2 midlayer3_minwidth=0.1 midlayer3_maxwidth=0.5 midlayer3_prefwidth=0.2 midlayer4_minwidth=0.1 midlayer4_maxwidth=0.5 midlayer4_prefwidth=0.2 midlayer7_minwidth=0.1 midlayer7_maxwidth=0.5 midlayer7_prefwidth=0.2 midlayer9_minwidth=0.1 midlayer9_maxwidth=0.5 midlayer9_prefwidth=0.2 bottomlayer_minwidth=0.1 bottomlayer_maxwidth=0.5 bottomlayer_prefwidth=0.2 maxuncoupledlength=12.7
FabricationTestPointUsage TestPointUsage [All] p1: valid=0 allowmultiple=FALSE
FabricationTestpoint Testpoint [All] p1: side=3 testpointundercomponent=TRUE minsize=1.016 maxsize=2.54 preferedsize=1.524 minholesize=0.508 maxholesize=1.016 preferedholesize=0.813 testpointgrid=0.025 allowsidetop=TRUE allowsidebottom=TRUE usegrid=TRUE gridtolerance=0
HoleSize [All] p1: absolutevalues=TRUE maxlimit=10 minlimit=0.15 maxpercent=80.000 minpercent=20.000
HoleToHoleClearance [All] p1: gap=0.15 allowstackedmicrovias=TRUE
MatchedLengths MatchedLengths_FT_FIFO [InNetClass('FT_FIFO')] p1: tolerance=5 checknetsindiffpair=FALSE checkdiffpairvsdiffpair=TRUE checkxsignals=TRUE checkothers=TRUE
MatchedLengths MatchedLengths_LMS_PORT1 [InNetClass('LMS_PORT1')] p2: tolerance=7 checknetsindiffpair=FALSE checkdiffpairvsdiffpair=TRUE checkxsignals=TRUE checkothers=TRUE // tolerance increased due to MCLK being longer
MatchedLengths MatchedLengths_LMS_PORT2 [InNetClass('LMS_PORT2')] p3: tolerance=7.5 checknetsindiffpair=FALSE checkdiffpairvsdiffpair=TRUE checkxsignals=TRUE checkothers=TRUE // tolerance increased due to MCLK being longer
MinimumSolderMaskSliver [All] p1: minsoldermaskwidth=0.05
PlaneClearance [All] p1: clearance=0
PolygonConnect PolygonConnect_VCC3P3 [InNet('VCC3P3')] p1: connectstyle=Direct reliefconductorwidth=0.254 reliefentries=4 polygonreliefangle="90 Angle" airgapwidth=0.254
PolygonConnect PolygonConnect_GND_VIA [InNet('GND') and isvia] p2: connectstyle=Direct reliefconductorwidth=0.254 reliefentries=4 polygonreliefangle="90 Angle" airgapwidth=0.254
PolygonConnect PolygonConnect_GND_MMCX [HasFootprint('MMCX_UFL_CONN_V3_M') and IsPad and InNet('GND')] p3: connectstyle=Relief reliefconductorwidth=0.7 reliefentries=4 polygonreliefangle="90 Angle" airgapwidth=0.254
PolygonConnect PolygonConnect_GND [InNet('GND') and (OnTopLayer or OnBottomLayer)] p4: connectstyle=Relief reliefconductorwidth=0.254 reliefentries=4 polygonreliefangle="90 Angle" airgapwidth=0.254
PolygonConnect PolygonConnect_GND_inner [InNet('GND') and not (OnTopLayer or OnBottomLayer)] p5: connectstyle=Direct reliefconductorwidth=0.254 reliefentries=4 polygonreliefangle="90 Angle" airgapwidth=0.254
PolygonConnect PolygonConnect_VCC1P0_INT [InNet('VCC1P0_INT')] p6: connectstyle=Direct reliefconductorwidth=0.254 reliefentries=4 polygonreliefangle="90 Angle" airgapwidth=0.254
PolygonConnect PolygonConnect_2P05 [InNet('VCC2P05')] p7: connectstyle=Direct reliefconductorwidth=0.254 reliefentries=4 polygonreliefangle="90 Angle" airgapwidth=0.254
PolygonConnect PolygonConnect_1P35 [InNet('VCC1P35')] p8: connectstyle=Direct reliefconductorwidth=0.254 reliefentries=4 polygonreliefangle="90 Angle" airgapwidth=0.254
PolygonConnect PolygonConnect_0P9 [InNet('VCC0P9')] p9: connectstyle=Direct reliefconductorwidth=0.254 reliefentries=4 polygonreliefangle="90 Angle" airgapwidth=0.254
PolygonConnect PolygonConnect_1P5 [InNet('VCC1P5')] p10: connectstyle=Direct reliefconductorwidth=0.254 reliefentries=4 polygonreliefangle="90 Angle" airgapwidth=0.254
PolygonConnect PolygonConnect_VCC1P2_MGTAVTT [InNet('VCC1P2_MGTAVTT')] p11: connectstyle=Direct reliefconductorwidth=0.254 reliefentries=4 polygonreliefangle="90 Angle" airgapwidth=0.254
PolygonConnect PolygonConnect_VCC1P8 [InNet('VCC1P8')] p12: connectstyle=Direct reliefconductorwidth=0.254 reliefentries=4 polygonreliefangle="90 Angle" airgapwidth=0.254
PolygonConnect PolygonConnect_VCC1P8_LMS [InNet('VCC1P8_LMS')] p13: connectstyle=Direct reliefconductorwidth=0.254 reliefentries=4 polygonreliefangle="90 Angle" airgapwidth=0.254
PolygonConnect PolygonConnect_VDIO_LMS [InNet('VDIO_LMS')] p14: connectstyle=Direct reliefconductorwidth=0.254 reliefentries=4 polygonreliefangle="90 Angle" airgapwidth=0.254
PolygonConnect PolygonConnect_VDIO_LMS_FPGA [InNet('VDIO_LMS_FPGA')] p15: connectstyle=Direct reliefconductorwidth=0.254 reliefentries=4 polygonreliefangle="90 Angle" airgapwidth=0.254
PolygonConnect [All] p16: connectstyle=Relief reliefconductorwidth=0.254 reliefentries=4 polygonreliefangle="90 Angle" airgapwidth=0.254
RoutingVias [All] p1: holewidth=0.2 width=0.4 viastyle="Through Hole" minholewidth=0.15 minwidth=0.3 maxholewidth=4.5 maxwidth=5
SilkToSilkClearance [All] p1: silktosilkclearance=0.1
SilkToSolderMaskClearance SilkscreenOverComponentPads [IsPad] p1: minsilkscreentomaskgap=0.1 clearancetoexposedcopper=TRUE
SolderMaskExpansion [All] p1: expansion=0.05
Width Width_FPGA_fanout [WithinRoom('FPGA_fanout')] p1: maxlimit=5 minlimit=0.076 preferedwidth=0.127
Width Width_ClumsyConnection [All] p2: maxlimit=7 minlimit=0.1 preferedwidth=0.2 checkconnectedcopper=TRUE
Width [All] p3: maxlimit=5 minlimit=0.1 preferedwidth=0.2
20 further rules are at their usual default settings.

## Classes and differential pairs
net class LMS_ADCIN2: LMS_ADCIN_I2_N LMS_ADCIN_I2_P LMS_ADCIN_Q2_N LMS_ADCIN_Q2_P
net class LMS_ADCIN1: LMS_ADCIN_I1_N LMS_ADCIN_I1_P LMS_ADCIN_Q1_N LMS_ADCIN_Q1_P
net class VCC_CLK_SW: VCC_CLK_SW
net class VCC3P3_SW: VCC3P3_SW
net class VCC3P3_LMK: VCC3P3_LMK
net class VCC3P3_LMKRF: VCC1P8_LMK_VDDO
net class VCC3P3_LMK_VDDO: VCC3P3_LMK_VDDO
net class LA_RO1_EXT: LA_RO1_EXT_I_N LA_RO1_EXT_I_P LA_RO1_EXT_Q_N LA_RO1_EXT_Q_P
net class LA_RO0_EXT: LA_RO0_EXT_I_N LA_RO0_EXT_I_P LA_RO0_EXT_Q_N LA_RO0_EXT_Q_P
net class LMS_TX1_BB: LMS_TX1_BB_I_N LMS_TX1_BB_I_P LMS_TX1_BB_Q_N LMS_TX1_BB_Q_P
net class LMS_RX2_BB: LMS_RX2_BB_I_N LMS_RX2_BB_I_P LMS_RX2_BB_Q_N LMS_RX2_BB_Q_P
net class LMS_RX1_BB: LMS_RX1_BB_I_N LMS_RX1_BB_I_P LMS_RX1_BB_Q_N LMS_RX1_BB_Q_P
net class LA_TX: LA_TX_I_N LA_TX_I_P LA_TX_Q_N LA_TX_Q_P
net class LA_RX1: LA_RX1_I_N LA_RX1_I_P LA_RX1_Q_N LA_RX1_Q_P
net class LA_RX0: LA_RX0_I_N LA_RX0_I_P LA_RX0_Q_N LA_RX0_Q_P
net class VCC3P3_RF: VCC3P3_RF
net class VCC1P35_SW: VCC1P35_SW
net class VCC1P35_LDO: VCC1P35_LDO
net class BOM_VER: BOM_VER0
net class VCC2P5: VCC2P05
net class VCC1P75: VCC1P75
net class VCC1P5: VCC1P5
net class VCC1P35: VCC1P35
net class VCC1P8: VCC1P8
net class VCC0P9: VCC0P9
component class 10_Clock: C181 C182 C183 C184 C185 C186 C187 C188 C189 C190 C191 C192 C193 C194 C195 C196 C197 C198 C199 C200 C201 C202 C203 C204 C205 C206 C207 C208 C209 C210 C211 C212 C213 C214 C215 C216 C217 C218 C219 C220 C221 C222 C223 ESD6 ESD7 ESD8 ESD9 FR38 FR39 FR40 FR41 FR42 FR43 IC17 IC18 IC19 IC20 IC21 J3 J4 J5 J6 R146 R147 R148 R149 R150 R151 R152 R153 R154 R155 R156 R157 R158 R159 R160 R161 R162 R163 R164 R165 R166 R167 R168 R169 R170 R171 R172 R173 R174 R175 R176 R177 R178 R179 R180 R181 R182 R183 R184 R185 R186 TP7 TP8 VT1 VT2 XO1 XO2
component class 08_BB_Processor: C110 C111 C112 C113 C114 C115 C116 C117 C118 C119 C120 C121 C122 C123 C124 C125 C126 C127 C128 C129 C130 C131 C132 C133 C134 C135 C136 C137 C138 C139 C140 C141 C142 C143 C144 C145 C146 C147 C148 C149 C150 C151 C152 C153 C154 C155 C156 C157 C158 C159 C160 D1 D2 D3 IC6 IC7 J1 R72 R73 R74 R75 R76 R77 R78 R79 R80 R81 R82 R83 R84 R85 R86 R87 R88 R89 R90 R91 R92 R93 R94 R95 R96 R97 R98 R99 R100 R101 R102 R103 R104 R105 R106 R107 TP1 TP2 TP3 X6
net class VCC_CLK: VCC_CLK
net class VCC3P3: VCC3P3
net class VCC3P3_MPCIE: VCC3P3_MPCIE
net class VCC3P3_CLK: VCC3P3_CLK
component class 09_Misc: C161 C162 C163 C164 C165 C166 C167 C168 C169 C170 C171 C172 C173 C174 C175 C176 C177 C178 C179 C180 ESD4 ESD5 FR35 FR36 FR37 IC8 IC9 IC10 IC11 IC12 IC13 IC14 IC15 IC16 J2 JMP1 JP1 L1 LED1 LED2 R108 R109 R110 R111 R112 R113 R114 R115 R116 R117 R118 R119 R120 R121 R122 R123 R124 R125 R126 R127 R128 R129 R130 R131 R132 R133 R134 R135 R136 R137 R138 R139 R140 R141 R142 R143 R144 R145 R229 R230 R231 R232 X5 X7 X8
component class 11_Power: C224 C225 C226 C227 C228 C229 C230 C231 C232 C233 C234 C235 C236 C237 C238 C239 C240 C241 C242 C243 C244 C245 C246 C247 C248 C249 C250 C251 C252 C253 C254 C255 C256 C257 C258 C259 C260 C261 C262 F1 F2 F3 F4 F5 F6 F7 F8 FL1 FL2 FR44 FR45 FR46 FR47 FR48 FR49 FR50 IC22 IC23 IC24 IC25 IC26 IC27 IC28 IC29 IC30 L2 L3 L4 L5 L6 L7 L8 L9 MECH1 MECH2 R187 R188 R189 R190 R191 R192 R193 R194 R195 R196 R197 R198 R199 R200 R201 R202 R203 R204 R205 R206 R207 R208 R209 R210 R211 R212 R213 R214 R215 R216 R217
net class VDIO_LMS: VDIO_LMS
net class VCC1P8_LMS: VCC1P8_LMS
net class RF_RX: RX1_H RX1_H_A_N RX1_H_A_P RX1_H_B_N RX1_H_B_P RX1_L RX1_L_A_N RX1_L_A_P RX1_L_B_N RX1_L_B_P RX1_W RX1_W_A_N RX1_W_A_P RX1_W_B_N RX1_W_B_P RX2_H RX2_H_A_N RX2_H_A_P RX2_H_B_N RX2_H_B_P RX2_L RX2_L_A_N RX2_L_A_P RX2_L_B_N RX2_L_B_P RX2_W RX2_W_A_N RX2_W_A_P RX2_W_B_N RX2_W_B_P
net class RF_TX: TX1_1 TX1_1_A_N TX1_1_A_P TX1_1_B_N TX1_1_B_P TX1_2 TX1_2_A_N TX1_2_A_P TX1_2_B_N TX1_2_B_P
component class 07_LMS7002M_Power: C50 C51 C52 C53 C54 C55 C56 C57 C58 C59 C60 C61 C62 C63 C64 C65 C66 C67 C68 C69 C70 C71 C72 C73 C74 C75 C76 C77 C78 C79 C80 C81 C82 C83 C84 C85 C86 C87 C88 C89 C90 C91 C92 C93 C94 C95 C96 C97 C98 C99 C100 C101 C102 C103 C104 C105 C106 C107 C108 C109 FR4 FR5 FR6 FR7 FR8 FR9 FR10 FR11 FR12 FR13 FR14 FR15 FR16 FR17 FR18 FR19 FR20 FR21 FR22 FR23 FR24 FR25 FR26 FR27 FR28 FR29 FR30 FR31 FR32 FR33 FR34 FR51 R65 R66 R67 R68 R69 R70 R71
component class 06_LMS7002M_RF: C29 C30 C31 C32 C33 C34 C35 C36 C37 C38 C39 C40 C41 C42 C43 C44 C45 C46 C47 C48 C49 ESD1 ESD2 ESD3 FR1 FR2 FR3 IC3 IC4 IC5 MN1 MN2 MN3 MN4 MN5 MN6 MN7 MN8 MN9 MN10 MN11 MN12 MN13 MN14 MN15 MN16 MN17 MN18 MN19 MN20 MN21 MN22 MN23 MN24 MN25 MN26 MN27 MN28 MN29 MN30 MN31 MN32 MN33 MN34 MN35 MN36 MN37 MN38 MN39 MN40 MN100 MN101 MN102 MN103 R59 R60 R61 R62 R63 R64 T1 T2 T3 T4 T5 T6 T7 T8 X1 X2 X4
net class CLK_PATH: ADF_REF_IN ADF_RF_IN CLK_IN CLK_IN_EXT CLK_XO EXT_PPS EXT_PPS_IN EXT_PPS_OUT GND GNSS_1PPS LA_PPS_IN LA_PPS_OUT LMK_CLKOUT1 LMK_CLKOUT4 LMS_RxPLL_CLK LMS_TxPLL_CLK NetC184_1 NetC185_2 NetC191_1 NetC281_1 NetIC17_17 NetIC17_18 NetR171_1 PCIE_CLK_IN PCIE_CLK_OUT PCIE_PPS_IN PCIE_PPS_OUT
component class 05_LMS7002M_Misc: C1 C2 C3 C4 C5 C6 C7 C9 C10 C11 C14 C15 C16 C19 C20 C21 C24 C25 C26 C28 IC1 IC2 R1 R2 R3 R4 R5 R6 R7 R8 R9 R10 R11 R12 R13 R14 R15 R16 R17 R18 R19 R20 R21 R22 R23 R24 R25 R26 R27 R28 R29 R30 R31 R32 R33 R34 R35 R36 R37 R38 R39 R40 R41 R42 R43 R44 R45 R46 R47 R48 R49 R50 R51 R52 R53 R54 R55 R56 R57 R58 X3
net class LA_SPI_LMS: LA_SPI_LMS_SS LA_SPI_MISO LA_SPI_MOSI LA_SPI_SCLK NetC7_2 NetIC1_D28 NetIC1_F28 NetIC1_F30
net class LMS_I2C: LMS_I2C_SCL LMS_I2C_SDA
net class RF_CTRL: TX_SW_DIV
net class VCC1P4_LMS: VCC1P4_LMS
net class VCC1P25_LMS: VCC1P25_LMS
differential pair LMS_ADCIN_Q2: +LMS_ADCIN_Q2_P -LMS_ADCIN_Q2_N
differential pair LMS_ADCIN_Q1: +LMS_ADCIN_Q1_P -LMS_ADCIN_Q1_N
differential pair LMS_ADCIN_I2: +LMS_ADCIN_I2_P -LMS_ADCIN_I2_N
differential pair LMS_ADCIN_I1: +LMS_ADCIN_I1_P -LMS_ADCIN_I1_N
differential pair T0: +T0_P -T0_N
differential pair R1: +R1_P -R1_N
differential pair C1: +C1_P -C1_N
differential pair LMS_TX2_BB_I: +LMS_TX2_BB_I_P -LMS_TX2_BB_I_N
differential pair LMS_TX2_BB_Q: +LMS_TX2_BB_Q_P -LMS_TX2_BB_Q_N
differential pair LA_TX_Q: +LA_TX_Q_P -LA_TX_Q_N
differential pair LA_TX_I: +LA_TX_I_P -LA_TX_I_N
differential pair LMS_TX1_BB_Q: +LMS_TX1_BB_Q_P -LMS_TX1_BB_Q_N
differential pair LMS_TX1_BB_I: +LMS_TX1_BB_I_P -LMS_TX1_BB_I_N
differential pair LMS_RX2_BB_Q: +LMS_RX2_BB_Q_P -LMS_RX2_BB_Q_N
differential pair LMS_RX2_BB_I: +LMS_RX2_BB_I_P -LMS_RX2_BB_I_N
differential pair LMS_RX1_BB_Q: +LMS_RX1_BB_Q_P -LMS_RX1_BB_Q_N
differential pair LMS_RX1_BB_I: +LMS_RX1_BB_I_P -LMS_RX1_BB_I_N
differential pair LA_RX1_Q: +LA_RX1_Q_P -LA_RX1_Q_N
differential pair LA_RX1_I: +LA_RX1_I_P -LA_RX1_I_N
differential pair LA_RX0_Q: +LA_RX0_Q_P -LA_RX0_Q_N
differential pair LA_RX0_I: +LA_RX0_I_P -LA_RX0_I_N
differential pair LA_RO1_Q: +LA_RO1_Q_P -LA_RO1_Q_N
differential pair LA_RO1_I: +LA_RO1_I_P -LA_RO1_I_N
differential pair LA_RO1_EXT_Q: +LA_RO1_EXT_Q_P -LA_RO1_EXT_Q_N
differential pair LA_RO1_EXT_I: +LA_RO1_EXT_I_P -LA_RO1_EXT_I_N
differential pair LA_RO0_Q: +LA_RO0_Q_P -LA_RO0_Q_N
differential pair LA_RO0_I: +LA_RO0_I_P -LA_RO0_I_N
differential pair LA_RO0_EXT_Q: +LA_RO0_EXT_Q_P -LA_RO0_EXT_Q_N
differential pair LA_RO0_EXT_I: +LA_RO0_EXT_I_P -LA_RO0_EXT_I_N
differential pair RX1_L_A: +RX1_L_A_P -RX1_L_A_N
differential pair TX1_2_B: +TX1_2_B_P -TX1_2_B_N
differential pair TX1_2_A: +TX1_2_A_P -TX1_2_A_N
differential pair RX2_W_B: +RX2_W_B_P -RX2_W_B_N
differential pair RX1_L_B: +RX1_L_B_P -RX1_L_B_N
differential pair RX2_W_A: +RX2_W_A_P -RX2_W_A_N
differential pair RX2_L_B: +RX2_L_B_P -RX2_L_B_N
differential pair RX2_L_A: +RX2_L_A_P -RX2_L_A_N
differential pair RX2_H_B: +RX2_H_B_P -RX2_H_B_N
differential pair RX2_H_A: +RX2_H_A_P -RX2_H_A_N
differential pair RX1_W_B: +RX1_W_B_P -RX1_W_B_N
differential pair RX1_W_A: +RX1_W_A_P -RX1_W_A_N
differential pair TX1_1_B: +TX1_1_B_P -TX1_1_B_N
differential pair TX1_1_A: +TX1_1_A_P -TX1_1_A_N
differential pair RX1_H_B: +RX1_H_B_P -RX1_H_B_N
differential pair RX1_H_A: +RX1_H_A_P -RX1_H_A_N

## Components (designator, comment, footprint, x,y, rotation, side; value= is the part's Value field where it differs from the comment)
C1 "4.7pF, 25V" CAP01005 13.625,8.925 r180 bottom
C2 "4.7pF, 25V" CAP01005 14,8.55 r180 bottom
C3 "4.7pF, 25V" CAP01005 14.375,8.925 r180 bottom
C4 "4.7pF, 25V" CAP01005 16.05,8.975 r0 bottom
C5 "4.7pF, 25V" CAP01005 15.625,8.55 r0 bottom
C6 "4.7pF, 25V" CAP01005 15.2,8.975 r0 bottom
C7 "22pF, 50V" CAP0201 22.125,21.175 r0 bottom
C9 "4.7pF, 25V" CAP01005 10.7,9.675 r90 bottom
C10 "22pF, 50V" CAP01005 9.75,10 r180 bottom
C11 "4.7pF, 25V" CAP01005 9.545,9.405 r0 bottom
C14 "4.7pF, 25V" CAP01005 14.725,6.81 r270 bottom
C15 "22pF, 50V" CAP01005 14.15,7.14 r90 bottom
C16 "4.7pF, 25V" CAP01005 14.725,7.47 r270 bottom
C19 "4.7pF, 25V" CAP01005 18.95,7.84 r90 bottom
C20 "22pF, 50V" CAP01005 17.925,7.925 r270 bottom
C21 "4.7pF, 25V" CAP01005 18.95,7.18 r90 bottom
C24 "4.7pF, 25V" CAP01005 18.988,9.47 r270 bottom
C25 "22pF, 50V" CAP01005 18.1,9.725 r90 bottom
C26 "4.7pF, 25V" CAP01005 18.988,10.13 r270 bottom
C28 "1uF, 6.3V" CAP0201 34.375,2.25 r270 top value="1uF, 20%"
C29 "100pF, 50V" CAP0201 36.8,21.95 r270 bottom
C30 "100pF, 50V" CAP0201 36.925,18.175 r90 bottom
C31 "100nF, 6.3V" CAP0201 37.45,21.95 r90 bottom
C32 "100nF, 6.3V" CAP0201 37.575,18.175 r270 bottom
C33 "100pF, 50V" CAP0201 39.9,18.2 r90 bottom
C34 "100pF, 50V" CAP0201 38.725,22.55 r270 bottom
C35 "100nF, 6.3V" CAP0201 39.025,18.2 r270 bottom
C36 "100nF, 6.3V" CAP0201 39.375,22.55 r90 bottom
C37 "1nF, 25V" CAP0201 35.85,5.35 r90 top
C38 "1nF, 25V" CAP0201 35.175,5.35 r90 top
C39 "510pF, 50V" CAP0402#1 34.925,23.95 r0 top
C40 "510pF, 50V" CAP0402#1 39.9,5.225 r0 top
C41 "510pF, 50V" CAP0402#2 35.677,4.2 r0 bottom
C42 "1nF, 25V" CAP0201 43.02,23.255 r90 bottom
C43 "100nF, 6.3V" CAP0201 44.425,23.1 r270 bottom
C44 "1nF, 25V" CAP0201 42.4,10.525 r180 top
C45 "1nF, 25V" CAP0201 43.5,10.525 r0 top
C46 "1nF, 25V" CAP0201 39.599,11.91 r180 bottom
C47 "1nF, 25V" CAP0201 40.725,11.85 r0 bottom
C48 "100nF, 6.3V" CAP0201 44.55,9.6 r270 top
C49 "100nF, 6.3V" CAP0201 41.675,12.325 r90 bottom
C50 "1uF, 6.3V" CAP0201 24.6,16.25 r90 top value="1uF, 20%"
C51 "1nF, 25V" CAP0201 23.785,15.958 r90 top
C52 "1uF, 6.3V" CAP0201 26.524,18.221 r270 top value="1uF, 20%"
C53 "1uF, 6.3V" CAP0201 28.8,21.655 r90 top value="1uF, 20%"
C54 "1uF, 6.3V" CAP0201 26.397,19.315 r270 top value="1uF, 20%"
C55 "1uF, 6.3V" CAP0201 31.801,15.49 r0 top value="1uF, 20%"
C56 "1uF, 6.3V" CAP0201 28.306,10.675 r0 top value="1uF, 20%"
C57 "1uF, 6.3V" CAP0201 22.83,17.349 r90 top value="1uF, 20%"
C58 "1nF, 25V" CAP0201 23.564,17.349 r90 top
C59 "1uF, 6.3V" CAP0201 26.027,12.785 r0 top value="1uF, 20%"
C60 "1nF, 25V" CAP0201 26.027,12.015 r0 top
C61 "1uF, 6.3V" CAP0201 26.027,14.31 r0 top value="1uF, 20%"
C62 "1nF, 25V" CAP0201 26.027,13.54 r0 top
C63 "1uF, 6.3V" CAP0201 33.475,18.175 r270 top value="1uF, 20%"
C64 "1uF, 6.3V" CAP0201 34.022,15.94 r45 top value="1uF, 20%"
C65 "1uF, 6.3V" CAP0201 32.3,19.225 r90 top value="1uF, 20%"
C66 "1uF, 6.3V" CAP0201 30.7,21.875 r90 top value="1uF, 20%"
C67 "1nF, 25V" CAP0201 28.855,18.18 r0 top
C68 "1uF, 6.3V" CAP0201 28.855,17.528 r0 top value="1uF, 20%"
C69 "1uF, 6.3V" CAP0201 27.7,18.2 r0 top value="1uF, 20%"
C70 "1uF, 6.3V" CAP0201 26.922,10.69 r315 top value="1uF, 20%"
C71 "1uF, 6.3V" CAP0201 24.595,8.4 r180 bottom value="1uF, 20%"
C72 "1uF, 6.3V" CAP0201 25.695,8.4 r180 bottom value="1uF, 20%"
C73 "1uF, 6.3V" CAP0201 26.795,8.4 r180 bottom value="1uF, 20%"
C74 "1uF, 6.3V" CAP0201 30.075,8.4 r0 bottom value="1uF, 20%"
C75 "1uF, 6.3V" CAP0201 33.65,11.5 r0 top value="1uF, 20%"
C76 "1uF, 6.3V" CAP0201 31.6,13.525 r0 top value="1uF, 20%"
C77 "1uF, 6.3V" CAP0201 34.725,17.3 r270 top value="1uF, 20%"
C78 "1uF, 6.3V" CAP0201 32.422,17.315 r270 top value="1uF, 20%"
C79 "1uF, 6.3V" CAP0201 24.175,7.45 r270 bottom value="1uF, 20%"
C80 "1uF, 6.3V" CAP0201 36.35,17.475 r90 bottom value="1uF, 20%"
C81 "1nF, 25V" CAP0201 28.314,20.05 r0 top
C82 "1uF, 6.3V" CAP0201 28.264,20.7 r0 top value="1uF, 20%"
C83 "1uF, 6.3V" CAP0201 32.197,12.24 r180 top value="1uF, 20%"
C84 "1uF, 6.3V" CAP0201 35.845,11.735 r270 bottom value="1uF, 20%"
C85 "1uF, 6.3V" CAP0201 36.495,11.735 r270 bottom value="1uF, 20%"
C86 "1uF, 6.3V" CAP0201 28.986,8.4 r180 bottom value="1uF, 20%"
C87 "1uF, 6.3V" CAP0201 25.475,21.45 r180 bottom value="1uF, 20%"
C88 "1nF, 25V" CAP0201 23.825,12.811 r270 top
C89 "1uF, 6.3V" CAP0201 23.125,12.811 r270 top value="1uF, 20%"
C90 "1nF, 25V" CAP0201 22.17,19.25 r180 bottom
C91 "1uF, 6.3V" CAP0201 22.17,20 r180 bottom value="1uF, 20%"
C92 "1nF, 25V" CAP0201 21.466,15.258 r180 top
C93 "1uF, 6.3V" CAP0201 21.466,14.541 r180 top value="1uF, 20%"
C94 "1nF, 25V" CAP0201 22.13,13.62 r270 top
C95 "1uF, 6.3V" CAP0201 21.475,13.62 r270 top value="1uF, 20%"
C96 "1nF, 25V" CAP0201 23.575,11.537 r90 top
C97 "1uF, 6.3V" CAP0201 24.225,11.537 r90 top value="1uF, 20%"
C98 "1uF, 6.3V" CAP0201 34.3,18.4 r315 top value="1uF, 20%"
C99 "1uF, 6.3V" CAP0201 27.025,19.67 r90 top value="1uF, 20%"
C100 "1uF, 6.3V" CAP0201 30.495,19.161 r270 top value="1uF, 20%"
C101 "1uF, 6.3V" CAP0201 29.075,19.4 r90 top value="1uF, 20%"
C102 "1uF, 6.3V" CAP0201 27.881,9.875 r0 top value="1uF, 20%"
C103 "1uF, 6.3V" CAP0201 27.875,8.4 r180 bottom value="1uF, 20%"
C104 "1uF, 6.3V" CAP0201 33.823,12.248 r225 top value="1uF, 20%"
C105 "1uF, 6.3V" CAP0201 36,16.355 r90 bottom value="1uF, 20%"
C106 "1uF, 6.3V" CAP0201 26.2,9.6 r315 top value="1uF, 20%"
C107 "1uF, 6.3V" CAP0201 31.75,18.3 r90 top value="1uF, 20%"
C108 "1uF, 6.3V" CAP0201 25.937,8.662 r45 top value="1uF, 20%"
C109 "1uF, 6.3V" CAP0201 30.55,17.675 r270 top value="1uF, 20%"
C110 "220nF, 10V" CAP0201 0.425,22.6 r0 top
C111 "220nF, 10V" CAP0201 0.425,23.325 r0 top
C112 "220nF, 10V" CAP0201 4.605,18.037 r0 bottom
C113 "1uF, 6.3V" CAP0201 16.5,17 r270 top value="1uF, 20%"
C114 "220nF, 10V" CAP0201 4.605,18.687 r0 bottom
C115 "1uF, 6.3V" CAP0603_FEEDTHROUGH 12.125,18.75 r0 top
C116 "220nF, 10V" CAP0201 0.425,9.903 r0 top
C117 "47uF, 6.3V" CAP0603#1 10.2,16.525 r270 top
C118 "4.7uF, 6.3V" CAP0201 11.25,15.6 r90 top
C119 "2.2uF, 6.3V" CAP0201 13.925,18.75 r180 top
C120 "4.7uF, 6.3V" CAP0201 13.725,17.675 r270 top
C121 "4.7uF, 6.3V" CAP0201 12.15,17.425 r90 top
C122 "3.3nF, 16V" CAP0201 12.275,15.7 r270 top
C123 "220nF, 10V" CAP0201 0.425,10.747 r0 top
C124 "100nF, 6.3V" CAP0201 1.65,21.175 r180 bottom
C125 "10uF, 10V" CAP0402#1 9.575,14.025 r0 top
C126 "1uF, 6.3V" CAP0201 11.1,14.55 r270 top value="1uF, 20%"
C127 "220nF, 10V" CAP0201 11.75,14.55 r270 top
C128 "4.7uF, 6.3V" CAP0201 16.45,16.2 r180 top
C129 "4.7uF, 6.3V" CAP0201 14.75,16.05 r90 top
C130 "100nF, 6.3V" CAP0201 3.225,21.175 r0 bottom
C131 "100pF, 50V" CAP0201 2.795,24.675 r0 bottom
C132 "100nF, 6.3V" CAP0201 2.8,25.325 r180 bottom
C133 "1uF, 6.3V" CAP0603_FEEDTHROUGH 10.175,9.025 r0 top
C134 "2.2uF, 6.3V" CAP0201 16.725,12.3 r90 top
C135 "10uF, 10V" CAP0402#1 12,8.95 r90 top
C136 "4.7uF, 6.3V" CAP0201 14.2,12.2 r0 top
C137 "4.7uF, 6.3V" CAP0201 14.3,15.2 r180 top
C138 "4.7uF, 6.3V" CAP0201 17.775,15.13 r90 top
C139 "4.7uF, 6.3V" CAP0201 13.15,15.2 r0 top
C140 "4.7uF, 6.3V" CAP0201 15.225,14.325 r0 top
C141 "4.7uF, 6.3V" CAP0201 13.44,13.47 r180 top
C142 "1uF, 6.3V" CAP0603_FEEDTHROUGH 18.5,17.125 r90 top
C143 "2.2uF, 6.3V" CAP0201 16.988,18.13 r270 top
C144 "4.7uF, 6.3V" CAP0201 16.338,18.13 r270 top
C145 "4.7uF, 6.3V" CAP0201 15.563,18.13 r270 top
C146 "1uF, 6.3V" CAP0603_FEEDTHROUGH 19.95,15.95 r270 top
C147 "10uF, 10V" CAP0402#1 9.575,13.025 r0 top
C148 "1uF, 6.3V" CAP0201 16.495,13.35 r0 top value="1uF, 20%"
C149 "100nF, 6.3V" CAP0201 15.35,13.05 r270 top
C150 "2.2uF, 6.3V" CAP0201 17.025,14.125 r90 top
C151 "10uF, 10V" CAP0402#1 18.775,14.85 r270 top
C152 "4.7uF, 6.3V" CAP0201 12.5,14.075 r90 top
C153 "4.7uF, 6.3V" CAP0201 16.35,14.57 r270 top
C154 "1uF, 6.3V" CAP0603_FEEDTHROUGH 10.825,10.7 r180 top
C155 "2.2uF, 6.3V" CAP0201 11.6,12.35 r90 top
C156 "10uF, 10V" CAP0402#1 9.575,12.025 r0 top
C157 "4.7uF, 6.3V" CAP0201 10.95,12.35 r90 top
C158 "4.7uF, 6.3V" CAP0201 10.95,13.5 r270 top
C159 "4.7uF, 6.3V" CAP0201 11.6,13.5 r270 top
C160 "4.7uF, 6.3V" CAP0201 14.4,14.375 r270 top
C161 "100nF, 6.3V" CAP0201 28.925,27.75 r90 bottom
C162 "100nF, 6.3V" CAP0201 16.4,29.175 r0 bottom
C163 "100nF, 6.3V" CAP0201 30.94,28.45 r0 bottom
C164 "100nF, 6.3V" CAP0201 21.525,29.175 r0 bottom
C165 "1nF, 25V" CAP0201 4.15,22.675 r270 top
C166 "100nF, 6.3V" CAP0201 40.105,0.4 r0 bottom
C167 "22pF, 50V" CAP0201 15.825,29.025 r0 top
C168 "22pF, 50V" CAP0201 17.3,29 r270 bottom
C169 "22pF, 50V" CAP0201 14.255,29.02 r270 bottom
C170 "100nF, 6.3V" CAP0201 16.725,25.65 r0 bottom
C171 "100nF, 6.3V" CAP0201 24.925,29.175 r0 bottom
C172 "100nF, 6.3V" CAP0201 14.105,24.737 r0 bottom
C173 "100nF, 6.3V" CAP0201 29.45,28.75 r0 bottom
C174 "22pF, 50V" CAP0201 6.675,0.83 r90 bottom
C175 "100pF, 50V" CAP0201 4.16,21.59 r90 top
C176 "4.7uF, 6.3V" CAP0402#1 2.15,22.35 r0 top
C177 "100nF, 6.3V" CAP0201 35.845,25.912 r180 bottom
C178 "100nF, 6.3V" CAP0201 8.625,7.535 r90 top
C179 "100nF, 6.3V" CAP0201 5.725,13.9 r0 bottom
C180 "100nF, 6.3V" CAP0201 33.925,28.8 r270 bottom
C181 "1uF, 6.3V" CAP0201 5.15,25.325 r90 bottom value="1uF, 20%"
C182 "100pF, 50V" CAP0201 6.45,25.325 r270 bottom
C183 "100nF, 6.3V" CAP0201 5.8,25.325 r270 bottom
C184 "100nF, 6.3V" CAP0201 8.975,6.325 r180 top
C185 "100nF, 6.3V" CAP0201 10.475,6.6 r90 top
C186 "100nF, 6.3V" CAP0201 5.4,23.85 r90 top
C187 "1uF, 6.3V" CAP0201 9.4,19.125 r0 top value="1uF, 20%"
C188 "100pF, 50V" CAP0201 22.29,18.211 r180 top
C189 "100pF, 50V" CAP0201 10.975,20.775 r270 bottom
C190 "100nF, 6.3V" CAP0201 9.65,19.775 r180 top
C191 "100nF, 6.3V" CAP0201 6.5,18.075 r270 bottom
C192 "100nF, 6.3V" CAP0201 7.8,18.075 r90 bottom
C193 "100nF, 6.3V" CAP0201 8.625,18.075 r180 bottom
C194 "100nF, 6.3V" CAP0201 7.93,12.125 r0 top
C195 "1uF, 6.3V" CAP0201 7.925,11.475 r0 top value="1uF, 20%"
C196 "100pF, 50V" CAP0201 26.125,20.55 r90 top
C197 "100pF, 50V" CAP0201 26.7,15.85 r180 top
C198 "1uF, 6.3V" CAP0201 3.875,19.825 r0 bottom value="1uF, 20%"
C199 "100pF, 50V" CAP0201 3.65,20.425 r0 bottom
C200 "100pF, 50V" CAP0201 0.95,26.025 r270 bottom
C201 "100nF, 6.3V" CAP0201 4.225,19.25 r180 bottom
C202 "100nF, 6.3V" CAP0201 5.5,5.155 r270 bottom
C203 "1nF, 25V" CAP0201 19.65,24.85 r225 bottom
C204 "100nF, 6.3V" CAP0201 4.15,5.135 r90 top
C205 "100nF, 6.3V" CAP0201 5.575,1.65 r270 top
C206 "1nF, 25V" CAP0201 1.75,15.075 r0 bottom
C207 "100pF, 50V" CAP0201 1.225,16.55 r0 top
C208 "100pF, 50V" CAP0201 1.445,17.2 r0 top
C209 "100pF, 50V" CAP0201 1.225,15.9 r0 top
C210 "100nF, 6.3V" CAP0201 8,15.825 r270 top
C211 "100pF, 50V" CAP0201 1.575,18.5 r0 top
C212 "100pF, 50V" CAP0201 0.35,17.2 r0 top
C213 "100pF, 50V" CAP0201 0.425,13.1 r0 top
C214 "100pF, 50V" CAP0201 7.325,15.825 r90 top
C215 "100pF, 50V" CAP0201 7.975,17.15 r90 top
C216 "100nF, 6.3V" CAP0201 8.65,17.15 r270 top
C217 "1nF, 25V" CAP0201 1.7,15.125 r270 top
C218 "1nF, 25V" CAP0201 0.425,13.85 r180 top
C219 "100pF, 50V" CAP0201 5.3,19.25 r180 top
C220 "22pF, 50V" CAP0201 6.425,19.25 r0 top
C221 "22pF, 50V" CAP0201 8.625,18.25 r270 top
C222 "22pF, 50V" CAP0201 7.95,18.25 r270 top
C223 "22pF, 50V" CAP0201 1.745,13.45 r180 top
C224 "4.7uF, 6.3V" CAP0402#2 6.325,2.975 r90 bottom
C225 "4.7uF, 6.3V" CAP0402#2 2.01,2.975 r90 bottom
C226 "1uF, 10V" CAP0402#2 12.175,7.4 r90 bottom
C227 "10uF, 10V" CAP0603#2 9.975,6.625 r180 bottom
C228 "100nF, 6.3V" CAP0201 19.6,2.625 r180 top
C229 "100nF, 6.3V" CAP0201 0.975,21.257 r270 top
C230 "100pF, 50V" CAP0201 2,0.675 r0 bottom
C231 "10uF, 10V" CAP0603#1 27.85,0.775 r180 top
C232 "47uF, 6.3V" CAP0603#2 22.6,1.55 r90 bottom
C233 "10uF, 10V" CAP0603#1 27.85,5.425 r180 top
C234 "4.7uF, 6.3V" CAP0402#1 20.1,5.325 r180 top
C235 "4.7uF, 6.3V" CAP0402#1 20.146,9.736 r180 top
C236 "10uF, 10V" CAP0603#1 24.05,0.775 r0 top
C237 "47uF, 6.3V" CAP0603#2 29.3,1.55 r90 bottom
C238 "10uF, 10V" CAP0603#1 24.05,5.425 r0 top
C239 "100pF, 50V" CAP0201 22.17,9.445 r0 top
C240 "100nF, 6.3V" CAP0201 27.725,3.22 r270 top
C241 "47uF, 6.3V" CAP0603#2 22.6,4.65 r270 bottom
C242 "47uF, 6.3V" CAP0603#3 29.3,4.525 r270 bottom
C243 "4.7uF, 6.3V" CAP0402#1 17.25,22 r90 top
C244 "4.7uF, 6.3V" CAP0402#1 22.175,21.4 r180 top
C245 "100pF, 50V" CAP0201 20.07,18.755 r0 top
C246 "4.7uF, 6.3V" CAP0402#2 32.3,4.3 r180 bottom
C247 "10uF, 10V" CAP0603#1 20.6,11.125 r0 top
C248 "1uF, 6.3V" CAP0201 31.75,0.7 r0 bottom value="1uF, 20%"
C249 "10uF, 10V" CAP0603#1 11.675,0.775 r0 top
C250 "4.7uF, 6.3V" CAP0402#1 16.7,11.125 r180 top
C251 "4.7uF, 6.3V" CAP0402#1 15.7,6.635 r0 top
C252 "47uF, 6.3V" CAP0603#2 16.925,4.65 r270 bottom
C253 "10uF, 10V" CAP0603#1 12.4,6.225 r270 top
C254 "10uF, 10V" CAP0603#1 15.475,5.425 r180 top
C255 "47uF, 6.3V" CAP0603#2 10.225,4.65 r270 bottom
C256 "100pF, 50V" CAP0201 13.68,6.805 r180 top
C257 "10uF, 10V" CAP0603#1 15.475,0.775 r180 top
C258 "100nF, 6.3V" CAP0201 11.8,2.905 r90 top
C259 "47uF, 6.3V" CAP0603#2 16.925,1.55 r90 bottom
C260 "47uF, 6.3V" CAP0603#2 10.225,1.55 r90 bottom
C261 "1uF, 6.3V" CAP0201 36.93,23.75 r0 bottom value="1uF, 20%"
C262 "1uF, 6.3V" CAP0201 31.575,24.4 r90 bottom value="1uF, 20%"
D1 "RB521S-30L2-TP" RB521S-30L2-TP_DFN1006 9.775,18.4 r180 top
D2 "RB521S-30L2-TP" RB521S-30L2-TP_DFN1006 17.401,16.85 r90 top
D3 "RB521S-30L2-TP" RB521S-30L2-TP_DFN1006 14.9,19.275 r90 top
ESD1 "ESD8472" ESD8472_X3DFN2 31.425,24.525 r180 top
ESD2 "ESD8472" ESD8472_X3DFN2 38.575,5.45 r90 top
ESD3 "ESD8472" ESD8472_X3DFN2 31.425,5.075 r180 top
ESD4 "ESD8472" ESD8472_X3DFN2 3.25,24.45 r270 top
ESD5 "ESD8472" ESD8472_X3DFN2 40.1,25.475 r90 top
ESD6 "ESD8472" ESD8472_X3DFN2 20.55,25.275 r180 top
ESD7 "ESD8472" ESD8472_X3DFN2 15.975,24.875 r180 top
ESD8 "ESD8472" ESD8472_X3DFN2 26.5,24.575 r180 top
ESD9 "ESD8472" ESD8472_X3DFN2 2.1,5.125 r90 top
F1 "Fiducial" Fiducial 3.005,-6.025 r0 top locked
F2 "Fiducial" Fiducial 52.825,-6.03 r0 top locked
F3 "Fiducial" Fiducial 52.825,35.73 r0 top locked
F4 "Fiducial" Fiducial 3,35.73 r180 bottom locked
F5 "Fiducial" Fiducial 3.005,-6.025 r180 bottom locked
F6 "Fiducial" Fiducial 52.825,-6.03 r180 bottom locked
F7 "Fiducial" Fiducial 52.825,35.73 r180 bottom locked
F8 "Fiducial" Fiducial 3,35.73 r0 top locked
FL1 "Fiducial" Fiducial_local 24.1,22.35 r0 top
FL2 "Fiducial" Fiducial_local 24.1,22.35 r180 bottom
FR1 "600R, 0.27A" RES0201 45.075,23.1 r90 bottom value=600R@100MHz
FR2 "600R, 0.27A" RES0201 44.725,10.735 r90 top value=600R@100MHz
FR3 "600R, 0.27A" RES0201 42.4,11.225 r0 top value=600R@100MHz
FR4 "600R, 0.27A" RES0201 28.025,11.5 r90 top value=600R@100MHz
FR5 "600R, 0.27A" RES0201 31.797,16.14 r180 top value=600R@100MHz
FR6 "600R, 0.27A" RES0201 25.472,19.595 r180 top value=600R@100MHz
FR7 "600R, 0.27A" RES0201 31.772,16.99 r270 top value=600R@100MHz
FR8 "600R, 0.27A" RES0201 35.428,17.445 r90 top value=600R@100MHz
FR9 "600R, 0.27A" RES0201 34.275,15.275 r45 top value=600R@100MHz
FR10 "600R, 0.27A" RES0201 31.6,12.875 r180 top value=600R@100MHz
FR11 "600R, 0.27A" RES0201 32.2,11.525 r180 top value=600R@100MHz
FR12 "600R, 0.27A" RES0201 29.8,7.45 r270 bottom value=600R@100MHz
FR13 "600R, 0.27A" RES0201 27.075,7.45 r270 bottom value=600R@100MHz
FR14 "600R, 0.27A" RES0201 25.97,7.45 r270 bottom value=600R@100MHz
FR15 "600R, 0.27A" RES0201 25.425,6.575 r0 bottom value=600R@100MHz
FR16 "600R, 0.27A" RES0201 27.275,11.5 r90 top value=600R@100MHz
FR17 "600R, 0.27A" RES0201 27.575,16.805 r270 top value=600R@100MHz
FR18 "600R, 0.27A" RES0201 28.55,16.675 r270 top value=600R@100MHz
FR19 "600R, 0.27A" RES0201 31.425,21.875 r90 top value=600R@100MHz
FR20 "600R, 0.27A" RES0201 33.097,19.515 r45 top value=600R@100MHz
FR21 "600R, 0.27A" RES0201 37.005,16.845 r0 bottom value=600R@100MHz
FR22 "600R, 0.27A" RES0201 29,7.45 r270 bottom value=600R@100MHz
FR23 "600R, 0.27A" RES0201 37.4,11.7 r0 bottom value=600R@100MHz
FR24 "600R, 0.27A" RES0201 27.909,21.655 r90 top value=600R@100MHz
FR25 "600R, 0.27A" RES0201 34.625,19 r315 top value=600R@100MHz
FR26 "600R, 0.27A" RES0201 37.025,16.08 r180 bottom value=600R@100MHz
FR27 "600R, 0.27A" RES0201 34.625,12.695 r270 top value=600R@100MHz
FR28 "600R, 0.27A" RES0201 28.15,7.45 r270 bottom value=600R@100MHz
FR29 "600R, 0.27A" RES0201 27.601,8.97 r270 top value=600R@100MHz
FR30 "600R, 0.27A" RES0201 27.275,21.875 r270 top value=600R@100MHz
FR31 "600R, 0.27A" RES0201 30.768,20.248 r45 top value=600R@100MHz
FR32 "600R, 0.27A" RES0201 27.275,20.75 r90 top value=600R@100MHz
FR33 "600R, 0.27A" RES0201 31.1,18.3 r270 top value=600R@100MHz
FR34 "600R, 0.27A" RES0201 25.4,9.2 r225 top value=600R@100MHz
FR35 "600R, 0.27A" RES0201 14.9,26.625 r270 top value=600R@100MHz
FR36 "600R, 0.27A" RES0201 10.875,23.525 r270 bottom value=600R@100MHz
FR37 "220R, 0.9A" RES0402#1 2.025,23.8 r270 top
FR38 "600R, 0.27A" RES0201 4.425,24.5 r0 bottom value=600R@100MHz
FR39 "600R, 0.27A" RES0201 21.725,19.775 r270 top value=600R@100MHz
FR40 "220R, 0.9A" RES0402#1 8.325,10.65 r0 top
FR41 "600R, 0.27A" RES0201 1.355,24.955 r90 bottom value=600R@100MHz
FR42 "600R, 0.27A" RES0201 4.995,3.995 r0 top value=600R@100MHz
FR43 "600R, 0.27A" RES0201 8.675,15.825 r270 top value=600R@100MHz
FR44 "220R, 0.9A" RES0402#2 7.375,2.475 r90 bottom
FR45 "600R, 2A" RES0805#1 10.125,8 r180 bottom
FR46 "220R, 0.9A" RES0402#1 20.075,4.25 r180 top
FR47 "220R, 0.9A" RES0402#1 16.2,22 r90 top
FR48 "220R, 0.9A" RES0402#2 30.575,1.55 r270 bottom
FR49 "220R, 0.9A" RES0402#2 31.75,2.175 r270 bottom
FR50 "220R, 0.9A" RES0402#1 14.6,11.1 r0 top
FR51 "600R, 0.27A" RES0201 31.6,14.85 r180 top value=600R@100MHz
IC1 "LMS7002M" LMS7002M_V5_LESS_SILK 29.265,14.85 r180 bottom locked
IC2 "M24128" M24128-DFMC6TG 36.05,1.675 r180 bottom
IC3 "SKY13414-485LF" SKY13414-485LF_RF_SW_QFN14 42.75,8.875 r180 top
IC4 "SKY13414-485LF" SKY13414-485LF_RF_SW_QFN14 40.1,13.65 r180 bottom
IC5 "SKY13330-397LF" SKY13330-397LF_RF_SW_QFN12 41.375,22.475 r0 bottom
IC6 "LA9310X7S11AA" LA9310X7S11AA 14.751,14.85 r0 bottom locked
IC7 "SN65LVDS1" SOT23-5_NO_SILK 2.45,22.95 r180 bottom locked
IC8 "SN74AVC4T774" SN74AVC4T774_v1 15.35,27.3 r180 bottom locked
IC9 "TMP1075NDRLR" TMP1075NDRLR_TEMPERATURE_SENSOR_SOT563 39.35,2.05 r270 bottom locked
IC10 "SN74AVC4T774" SN74AVC4T774_v1 26.575,27.3 r180 bottom locked
IC11 "GNSS M10578-A3" M10578-A3_V2 10.15,24.55 r90 top locked
IC12 "SN74AVC4T774" SN74AVC4T774_v1 18.925,27.3 r180 bottom locked
IC13 "SN74AVC4T774" SN74AVC4T774_v1 22.975,27.3 r180 bottom locked
IC14 "M24512" M24128-DFMC6TG 38.025,28.35 r180 bottom
IC15 "MCP23017-E/ML" MCP23017-E/ML_QFN28 4.725,9.675 r270 bottom
IC16 "ATECC508A" ATECC508A_UDFN8_v2 38.425,26.1 r180 bottom
IC17 "LMK00101" LMK00101_WQFN32 7.7,21.65 r0 bottom
IC18 "74LVC1G3157FZ4" 74LVC1G3157FZ4_SPDT_SW_DFN1410-6 18.55,23.025 r0 bottom
IC19 "AD5693BCPZ-RL7" AD5693RACPZ-1RL7_DAC_8LFCSP 6.9,3.625 r90 top
IC20 "74LVC1G3157FZ4" 74LVC1G3157FZ4_SPDT_SW_DFN1410-6 1.725,17.4 r270 bottom
IC21 "ADF4002" ADF4002 4.525,16.375 r270 top
IC22 "LD39100PUR" LD39100PUR 4.175,2.075 r180 bottom
IC23 "74LVC1G3157FZ4" 74LVC1G3157FZ4_SPDT_SW_DFN1410-6 21.275,2.15 r135 top
IC24 "AS431" SOT23-3_v3 3.3,20.4 r0 top
IC25 "LP8758A2E3YFFR" LP8758A1E0YFFR_QUAD_DC-DC_35DSBGA 25.95,3.1 r180 top
IC26 "LD39100PUR" LD39100PUR 21.05,7.475 r90 top
IC27 "LD39100PUR" LD39100PUR 19.4,21.1 r0 top
IC28 "LD39100PUR" LD39100PUR 14.8,8.8 r270 top
IC29 "LP8758A2E3YFFR" LP8758A1E0YFFR_QUAD_DC-DC_35DSBGA 13.575,3.1 r0 top
IC30 "AP7330" AP7330-W5-7_SOT25 34.4,23.725 r180 bottom
J1 "Molex 0788641001" MOLEX_0788641001_SPRING_CONTACTS 10.45,26.95 r270 bottom locked
J2 "U.FL/MMCX" MMCX_UFL_conn_u_v2#1 38.55,27.325 r180 top locked
J3 "U.FL/MMCX" MMCX_UFL_conn_u_v2#2 22.3,27.325 r180 top locked
J4 "U.FL/MMCX" MMCX_UFL_conn_u_v2#3 17.575,27.325 r180 top locked
J5 "U.FL/MMCX" MMCX_UFL_conn_u_v2#4 27.05,27.325 r180 top locked
J6 "U.FL/MMCX" MMCX_UFL_conn_u_v2#1 2.725,2.375 r0 top locked
JMP1 "1 pcs." MECH_JUMPER_HALF_PITCH 35.125,29.075 r90 top
JP1 "Header 2X1" HEADER_2x1_TH_HALF_PITCH 35.075,27.875 r90 top
L1 "47nH" RES0402#1 4.125,24.175 r270 top
L2 "0.47uH, 4A" IND0806 24.275,1.65 r90 bottom
L3 "0.47uH, 4A" IND0806 27.625,1.65 r90 bottom
L4 "0.47uH, 4A" IND0806 24.275,4.55 r270 bottom
L5 "0.47uH, 4A" IND0806 27.625,4.55 r270 bottom
L6 "0.47uH, 4A" IND0806 15.225,4.55 r270 bottom
L7 "0.47uH, 4A" IND0806 11.925,4.55 r270 bottom
L8 "0.47uH, 4A" IND0806 15.225,1.65 r90 bottom
L9 "0.47uH, 4A" IND0806 11.925,1.65 r90 bottom
LED1 "LED_green" LED0201 18.75,1.525 r270 top
LED2 "LED_green" LED0201 19.9,1.525 r270 top
MECH1 "BMI-S-202-C" BMI-S-202-C_RF_SHIELD_COVER 37.868,14.85 r0 top
MECH2 "BMI-S-202-F" BMI-S-202-F_RF_SHIELD_FRAME_v3 37.909,14.85 r0 top locked
MN1 "10 nH, 5%" RES0402#2 35.9,19.05 r270 bottom
MN2 "10 nH, 5%" RES0402#2 35.9,21.05 r90 bottom
MN3 "10 pF, 50V" CAP0402#2 38.5,20.55 r0 bottom
MN4 "0.5pF" CAP0402#2 40.05,20.05 r270 bottom
MN5 "1pF" CAP0402#2 36.95,20.05 r90 bottom
MN6 "10 pF, 50V" CAP0402#2 38.5,19.55 r180 bottom
MN7 "100uH" RES0805#2 37.75,18.2 r0 top
MN8 "100uH" RES0805#2 37.75,21.75 r0 top
MN9 "0R" RES0402#1 35.675,18.975 r270 top
MN10 "0R" RES0402#1 35.675,20.975 r90 top
MN11 "100nF, 16V" CAP0402#1 38.3,20.475 r180 top
MN12 "1pF, 50V" CAP0402#1 36.725,19.975 r270 top
MN13 "2pF, 50V" CAP0402#1 39.85,20 r90 top
MN14 "100nF, 16V" CAP0402#1 38.275,19.475 r0 top
MN15 "470pF, 50V" CAP0402#2 37.502,10.405 r180 bottom
MN16 "470pF, 50V" CAP0402#2 35.697,6.253 r180 bottom
MN17 "10 nH, 5%" RES0402#2 37.248,5.753 r90 bottom
MN18 "10 nH, 5%" RES0402#2 39.052,9.905 r90 bottom
MN19 "1pF, 50V" CAP0402#2 34.147,5.753 r90 bottom
MN20 "1pF, 50V" CAP0402#2 35.952,9.905 r90 bottom
MN21 "470pF, 50V" CAP0402#2 35.697,5.253 r180 bottom
MN22 "470pF, 50V" CAP0402#2 37.502,9.405 r180 bottom
MN23 "10 pF, 50V" CAP0402#1 38.048,15.575 r180 top
MN24 "10 pF, 50V" CAP0402#2 37.502,8.305 r180 bottom
MN25 "0.5pF, 50V" CAP0402#1 39.598,16.075 r270 top
MN26 "0.5pF, 50V" CAP0402#2 39.052,7.805 r90 bottom
MN27 "1pF, 50V" CAP0402#1 36.498,16.075 r270 top
MN28 "1pF, 50V" CAP0402#2 35.952,7.805 r90 bottom
MN29 "10 pF, 50V" CAP0402#1 38.048,16.575 r180 top
MN30 "10 pF, 50V" CAP0402#2 37.502,7.305 r180 bottom
MN31 "100pF, 50V" CAP0402#1 33.75,8.975 r180 top
MN32 "100pF, 50V" CAP0402#1 37.988,13.1 r180 top
MN33 "10 nH, 5%" RES0402#1 35.35,8.475 r90 top
MN34 "10 nH, 5%" RES0402#1 39.588,13.6 r270 top
MN35 "0.8pF" CAP0402#1 32.2,8.475 r90 top
MN36 "0.8pF" CAP0402#1 36.438,13.6 r270 top
MN37 "100pF, 50V" CAP0402#1 33.75,7.975 r180 top
MN38 "100pF, 50V" CAP0402#1 37.988,14.1 r180 top
MN39 "47nH" RES0402#1 37.25,5.275 r180 top
MN40 "47nH" RES0402#1 33.775,5.075 r0 top
R1 "243R, 1%" RES01005 13.46,8.36 r90 bottom
R2 "220R, 1%" RES01005 13.65,9.9 r0 bottom
R3 "82R, 1%" RES01005 14,9.425 r90 bottom
R4 "220R, 1%" RES01005 14.35,9.9 r180 bottom
R5 "243R, 1%" RES01005 14.54,8.36 r90 bottom
R6 "100R, 1%" RES0201 42.625,15.325 r270 bottom
R7 "0R" RES0201 22.85,13.725 r90 bottom
R8 "10k, 1%" RES0201 23.2,14.475 r0 top
R9 "100R, 1%" RES0201 37.075,14.125 r270 bottom
R10 "10k, 1%" RES0201 25.575,17.95 r270 top
R11 "10k, 1%" RES0201 23.2,15.125 r180 top
R12 "10k, 1%" RES0201 21.925,14.6 r180 bottom
R13 "10k, 1%" RES0201 20.95,14.84 r270 bottom
R14 "243R, 1%" RES01005 16.165,8.36 r90 bottom
R15 "0R" RES0402#2 20.075,14.625 r90 bottom
R16 "220R, 1%" RES01005 16,9.975 r180 bottom
R17 "82R, 1%" RES01005 15.625,9.475 r90 bottom
R18 "220R, 1%" RES01005 15.25,9.975 r0 bottom
R19 "243R, 1%" RES01005 15.085,8.36 r90 bottom
R20 "47R, 1%" RES0201 21.95,22.05 r90 bottom
R21 "47R, 1%" RES0201 23.4,19.225 r180 top
R22 "47R, 1%" RES0201 23.4,19.957 r180 top
R23 "47R, 1%" RES0201 22.6,22.05 r90 bottom
R24 "0R" RES0201 22.075,16.35 r270 bottom
R25 "10k, 1%" RES0201 22,17.05 r180 top
R26 "0R" RES0201 37.475,3.25 r180 bottom
R27 "220R, 1%" RES01005 11.24,9.65 r0 bottom
R28 "0R" RES01005 33.685,21.916 r180 bottom
R29 "1k, 1%" RES01005 10.25,9.675 r90 bottom
R30 "0R" RES0201 34.725,26.175 r180 bottom
R31 "100R, 1%" RES01005 12.44,9.375 r270 bottom
R32 "1k, 1%" RES01005 10.075,9.025 r90 bottom
R33 "220R, 1%" RES01005 11.24,9.1 r0 bottom
R34 "0R" RES01005 34.465,21.916 r0 bottom
R35 "10k, 1%" RES0201 30.65,16.6 r270 top
R36 "220R, 1%" RES01005 15.85,6.865 r0 bottom
R37 "0R" RES01005 33.925,13.675 r45 top
R38 "1k, 1%" RES01005 15.25,6.81 r270 bottom
R39 "100R, 1%" RES01005 17.025,7.14 r90 bottom
R40 "1k, 1%" RES01005 15.275,7.47 r270 bottom
R41 "220R, 1%" RES01005 15.85,7.415 r0 bottom
R42 "0R" RES01005 34.075,14.425 r0 top
R43 "220R, 1%" RES01005 19.675,7.785 r0 bottom
R44 "0R" RES01005 36.425,13.025 r90 bottom
R45 "1k, 1%" RES01005 18.375,8.015 r90 bottom
R46 "100R, 1%" RES01005 21,8.01 r270 bottom
R47 "1k, 1%" RES01005 18.375,7.355 r90 bottom
R48 "220R, 1%" RES01005 19.675,7.235 r0 bottom
R49 "0R" RES01005 35.925,13.025 r90 bottom
R50 "220R, 1%" RES01005 19.7,9.525 r0 bottom
R51 "0R" RES01005 35.675,14.975 r90 bottom
R52 "1k, 1%" RES01005 18.475,9.275 r270 bottom
R53 "3k3, 1%" RES0201 33.025,3.075 r180 bottom
R54 "3k3, 1%" RES0201 33.85,2.15 r90 bottom
R55 "100R, 1%" RES01005 20.25,9.8 r90 bottom
R56 "1k, 1%" RES01005 18.475,10.175 r270 bottom
R57 "220R, 1%" RES01005 19.7,10.075 r0 bottom
R58 "0R" RES01005 33.275,13.675 r45 top
R59 "1k, 1%" RES0201 40.45,27.725 r270 bottom
R60 "1k, 1%" RES0201 40.9,17.975 r180 bottom
R61 "1k, 1%" RES0201 40.895,18.7 r180 bottom
R62 "4.7k, 1%" RES0201 40.45,28.8 r90 bottom
R63 "4.7k, 1%" RES0201 42.095,18.7 r0 bottom
R64 "4.7k, 1%" RES0201 39.375,12.075 r90 top
R65 "0R" RES0402#1 24.746,10.321 r45 top
R66 "10R, 1%" RES0201 23.4,7.451 r270 bottom
R67 "10R, 1%" RES0201 24.875,7.45 r270 bottom
R68 "0R" RES0201 25.575,22.45 r90 bottom
R69 "0R" RES0402#1 20.325,12.925 r0 top
R70 "10R, 1%" RES0201 31.15,19.4 r90 top
R71 "10R, 1%" RES0201 26.7,8.175 r180 top
R72 "100k, 1%" RES0201 0.425,4.45 r0 top
R73 "10k, 1%" RES0201 17.775,18.625 r180 top
R74 "10k, 1%" RES0201 15.525,16.6 r90 top
R75 "0R33, 1%" RES0201 11.3,17.425 r90 top
R76 "0R" RES0201 14.925,25.05 r270 bottom
R77 "10k, 1%" RES0201 2.325,22.425 r180 bottom
R78 "0R" RES0201 2.05,23.325 r270 bottom
R79 "47R, 1%" RES0201 19.62,18.23 r270 bottom
R80 "698R, 1%" RES0201 13.251,16.85 r0 top
R81 "200R, 1%" RES0201 13.425,15.85 r0 top
R82 "6.8R, 1%" RES0201 7.625,14.95 r270 bottom
R83 "5R1, 1%" RES0201 9.413,14.85 r180 top
R84 "0R" RES0201 22.225,13.725 r90 bottom
R85 "47R, 1%" RES0201 0.225,23.625 r90 bottom
R86 "6.8R, 1%" RES0201 8.275,14.95 r270 bottom
R87 "1k, 1%" RES0201 19.9,17.3 r0 bottom
R88 "0R" RES0201 2.5,21.775 r0 bottom
R89 "10k, 1%" RES0201 14.1,25.525 r180 bottom
R90 "0R" RES0201 16.15,19.4 r90 top
R91 "47R, 1%" RES01005 9.719,13.13 r180 bottom
R92 "47R, 1%" RES01005 9.724,12.575 r180 bottom
R93 "47R, 1%" RES01005 9.615,11.2 r180 bottom
R94 "47R, 1%" RES01005 9.615,11.775 r180 bottom
R95 "47R, 1%" RES01005 19.875,11.25 r0 bottom
R96 "47R, 1%" RES01005 19.875,11.75 r0 bottom
R97 "47R, 1%" RES01005 19.96,13.05 r0 bottom
R98 "47R, 1%" RES01005 19.96,12.5 r0 bottom
R99 "2.67k, 1%" RES0201 14,12.85 r180 top
R100 "0R" RES01005 9.005,13.295 r90 bottom
R101 "0R" RES01005 9.01,12.41 r270 bottom
R102 "0R" RES01005 8.855,11.05 r180 bottom
R103 "0R" RES01005 8.855,11.6 r180 bottom
R104 "0R" RES01005 20.865,10.785 r270 bottom
R105 "0R" RES01005 20.865,11.665 r90 bottom
R106 "0R" RES01005 20.625,13.215 r90 bottom
R107 "0R" RES01005 20.625,12.335 r270 bottom
R108 "15R, 1%" RES0201 3.525,22.55 r270 top
R109 "0R" RES0201 17.95,29 r90 bottom
R110 "10k, 1%" RES0201 20.95,26.425 r270 bottom
R111 "10k, 1%" RES0201 17.875,25.65 r0 bottom
R112 "10k, 1%" RES0201 32.875,28.81 r90 bottom
R113 "10k, 1%" RES0201 32.05,27.55 r270 bottom
R114 "10k, 1%" RES0201 30.4,27.55 r270 bottom
R115 "10k, 1%" RES0201 31.225,27.55 r270 bottom
R116 "10k, 1%" RES0201 32.875,27.55 r270 bottom
R117 "10k, 1%" RES0201 26.825,25.575 r180 bottom
R118 "10k, 1%" RES0201 16.7,25.025 r180 bottom
R119 "10k, 1%" RES0201 29.575,27.55 r270 bottom
R120 "0R" RES0201 24.125,25.425 r180 bottom
R121 "0R" RES0201 27.745,24.575 r180 top
R122 "3k3, 1%" RES0201 33.625,26.275 r270 bottom
R123 "3k3, 1%" RES0201 31.975,26.275 r270 bottom
R124 "3k3, 1%" RES0201 30.325,26.275 r270 bottom
R125 "3k3, 1%" RES0201 31.15,26.275 r270 bottom
R126 "3k3, 1%" RES0201 32.8,26.275 r270 bottom
R127 "3k3, 1%" RES0201 27.2,24.925 r0 bottom
R128 "3k3, 1%" RES0201 15.65,20.175 r270 bottom
R129 "3k3, 1%" RES0201 29.5,26.275 r270 bottom
R130 "10k, 1%" RES0201 7.775,6.9 r0 top
R131 "0R" RES0201 28.75,26.65 r270 bottom
R132 "0R" RES0201 3.65,25.325 r270 bottom
R133 "0R" RES0201 4.5,25.325 r270 bottom
R134 "330R, 1%" RES0201 0.425,23.999 r0 top
R135 "100k, 1%" RES0201 0.449,14.467 r0 bottom
R136 "0R" RES0201 0.45,13.1 r0 bottom
R137 "330R, 1%" RES0201 43.7,6.6 r90 bottom
R138 "0R" RES0201 0.447,11.533 r180 bottom
R139 "0R" RES0201 0.45,12.181 r0 bottom
R140 "0R" RES0201 0.45,13.75 r0 bottom
R141 "0R" RES0201 0.424,9.05 r180 top
R142 "330R, 1%" RES0201 42.95,6.605 r90 bottom
R143 "0R" RES0201 0.425,6.872 r180 top
R144 "0R" RES0201 0.425,6.128 r180 top
R145 "100k, 1%" RES0201 0.183,26.53 r270 bottom
R146 "47R, 1%" RES0201 9.83,6.6 r90 top
R147 "0R" RES0402#1 7.805,9.055 r90 top
R148 "47R, 1%" RES0201 7.15,18.075 r90 bottom
R149 "0R" RES0201 25.325,20.825 r0 top
R150 "0R" RES0201 26.425,16.725 r270 top
R151 "0R" RES0201 0.425,15.325 r180 top
R152 "0R" RES0201 7.075,25.325 r90 bottom
R153 "0R" RES0201 15.975,25.525 r180 top
R154 "0R" RES0201 18.55,24.1 r0 bottom
R155 "10k, 1%" RES0201 18.475,21.35 r315 bottom
R156 "100R, 1%" RES0201 5.455,4.885 r90 top
R157 "10k, 1%" RES0201 2.97,5.37 r0 top
R158 "0R" RES0201 7.875,0.85 r180 top
R159 "0R" RES0201 6.75,1.2 r0 top
R160 "0R" RES0201 2.9,16.775 r90 bottom
R161 "10k, 1%" RES0201 4.805,5.135 r90 top
R162 "0R" RES0201 14.65,21.95 r90 bottom
R163 "0R" RES0201 4.625,5.425 r180 bottom
R164 "3k, 1%" RES0201 6.8,0.525 r180 top
R165 "12.7k, 1%" RES0201 6.175,5.155 r270 bottom
R166 "47R, 1%" RES0201 1.35,17.85 r0 top
R167 "0R" RES0201 14.825,23.375 r0 bottom
R168 "10R, 1%" RES0201 9.3,16.59 r270 top
R169 "0R" RES0201 14.825,24.025 r0 bottom
R170 "1k, 1%" RES0201 1.475,14.1 r0 top
R171 "47R, 1%" RES0201 14.825,22.75 r180 bottom
R172 "0R" RES0201 15.65,23.425 r90 bottom
R173 "470, 1%" RES0201 7.275,18.25 r270 top
R174 "47R, 1%" RES0201 0.425,14.6 r0 top
R175 "3k3, 1%" RES0201 12.305,21.65 r0 bottom
R176 "3k3, 1%" RES0201 13.974,20.093 r270 bottom
R177 "10k, 1%" RES0201 7.6,14.775 r0 top
R178 "10k, 1%" RES0201 7.3,17.15 r90 top
R179 "330R, 1%" RES0201 8.1,19.2 r180 top
R180 "47R, 1%" RES0201 2.82,13.45 r0 top
R181 "0R" RES0201 29.35,25.625 r90 top
R182 "47R, 1%" RES0201 7.6,13.275 r0 top
R183 "47R, 1%" RES0201 7.6,14.025 r0 top
R184 "0R" RES0201 0.985,24.925 r180 top